# Altium PCB EMG_MainBoard_Layout.PcbDoc (part 1 of 7)
Units mm, origin at the board's own origin, x right, y up, seen from the top; angles counter-clockwise.
Board outline 59.1 x 36 mm, 6 copper layers (L1 TOP, L2 GND, L3 SIGNAL, L4 GND, L5 POWER SIGNAL, L6 BOTTOM), stack 1.146 mm thick; 231 components, 136 nets, 812 pads, 470 vias.
Unrouted connection lines stored in the file: 570.
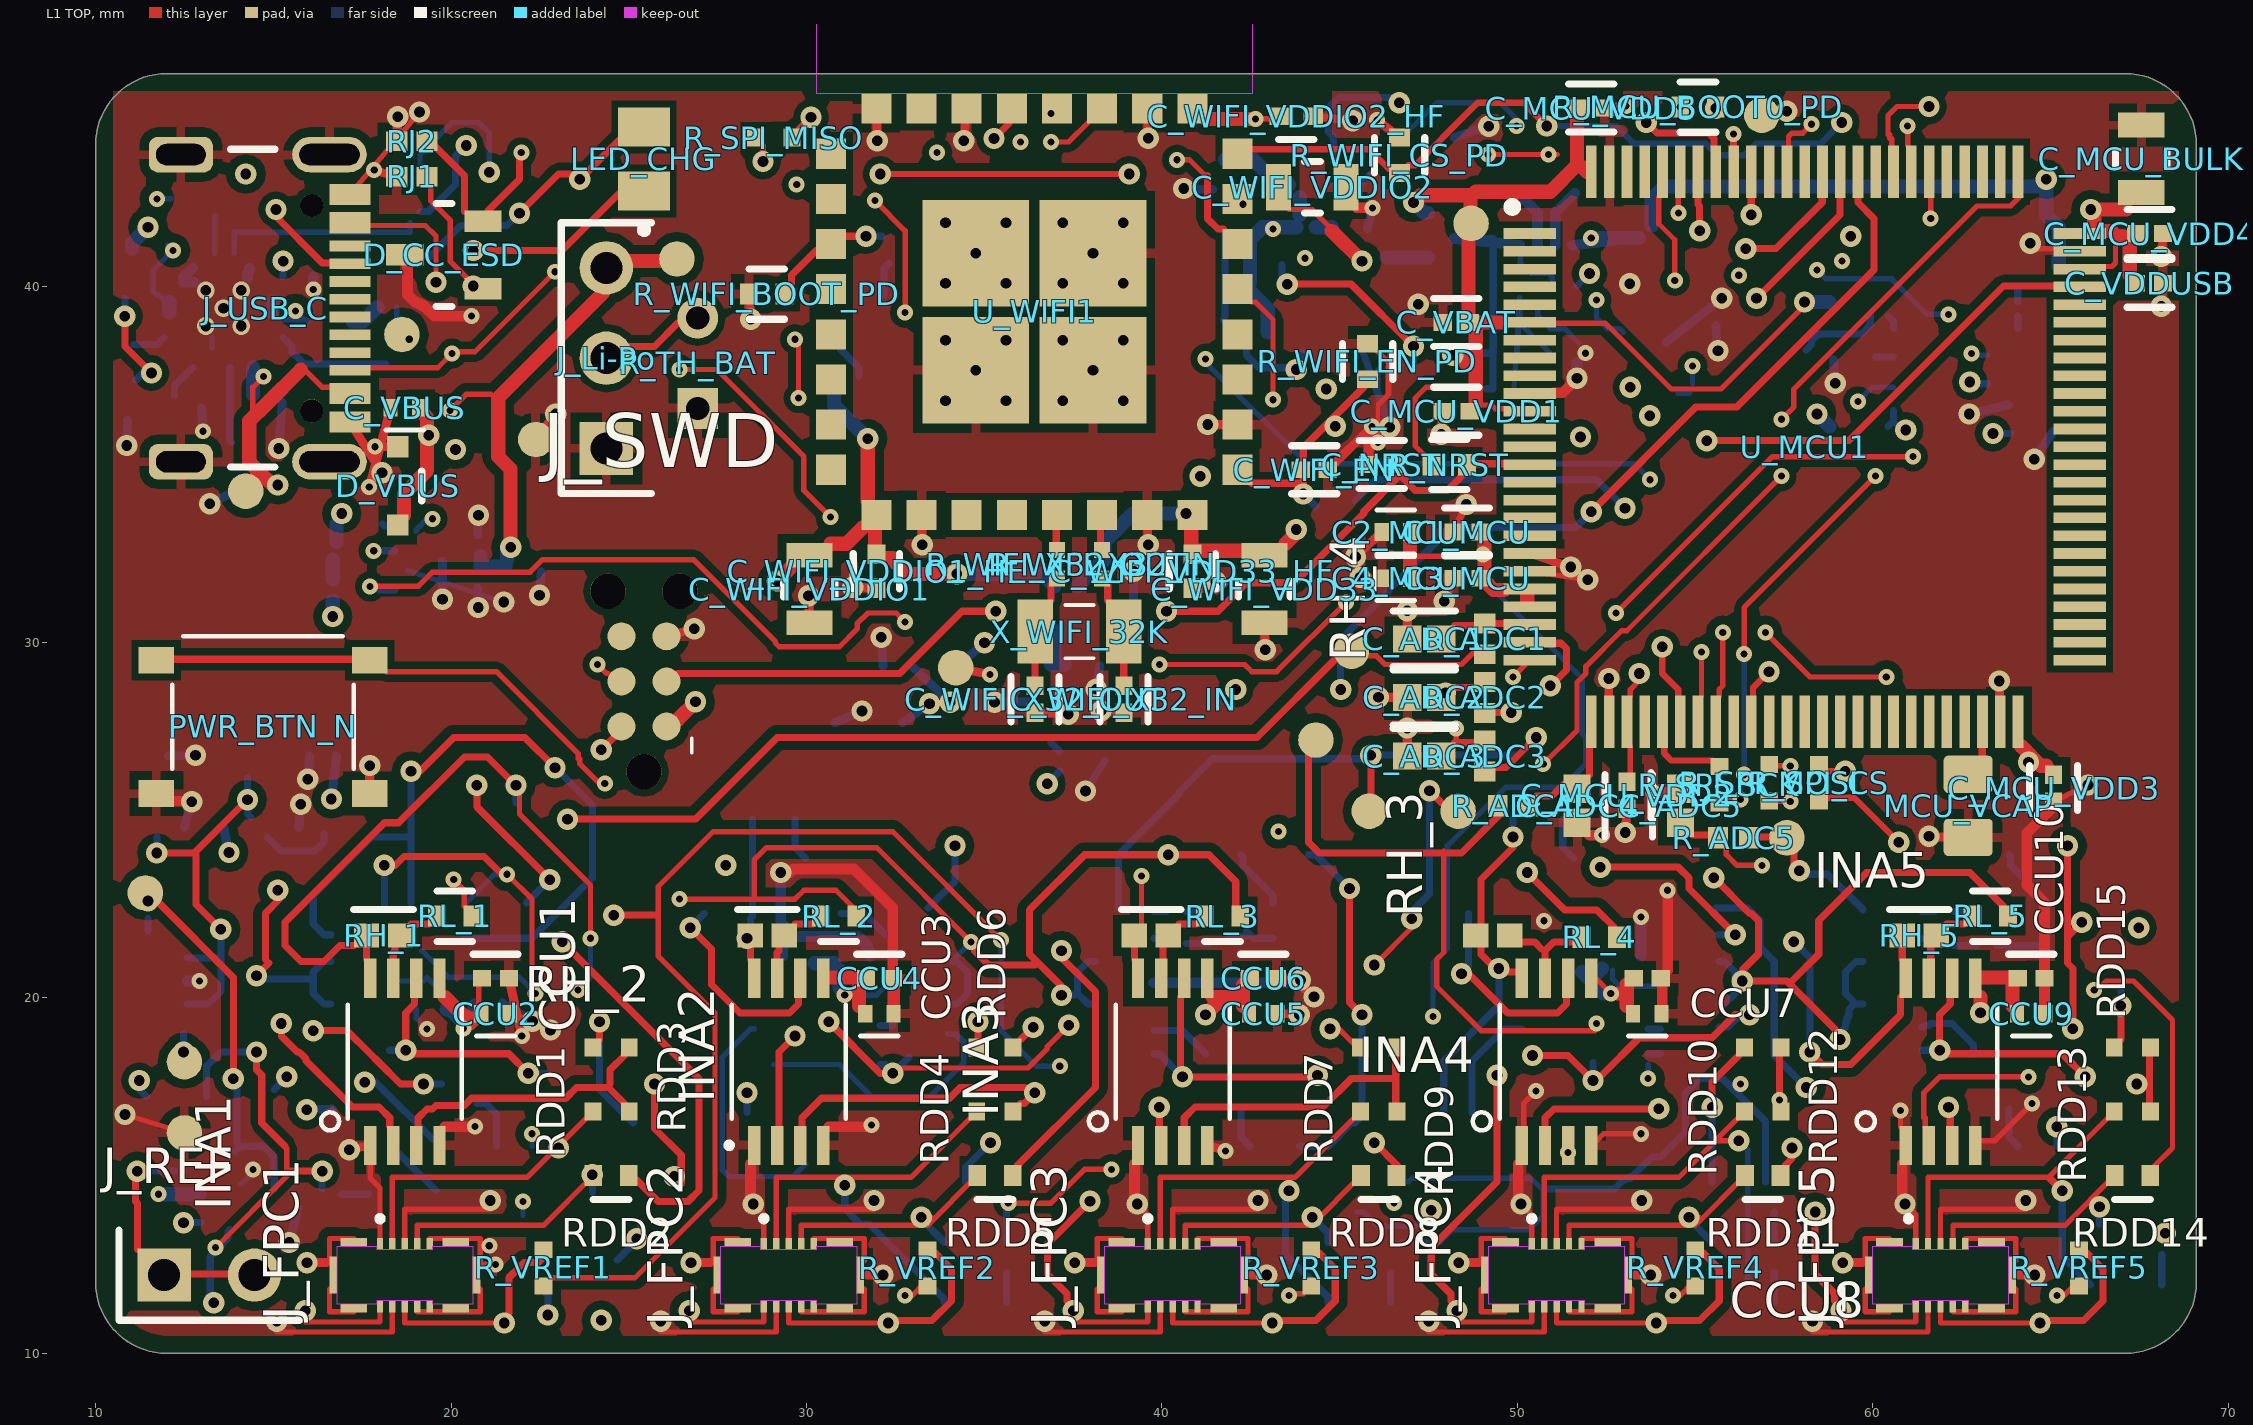
[diagram p0: L1 TOP view]
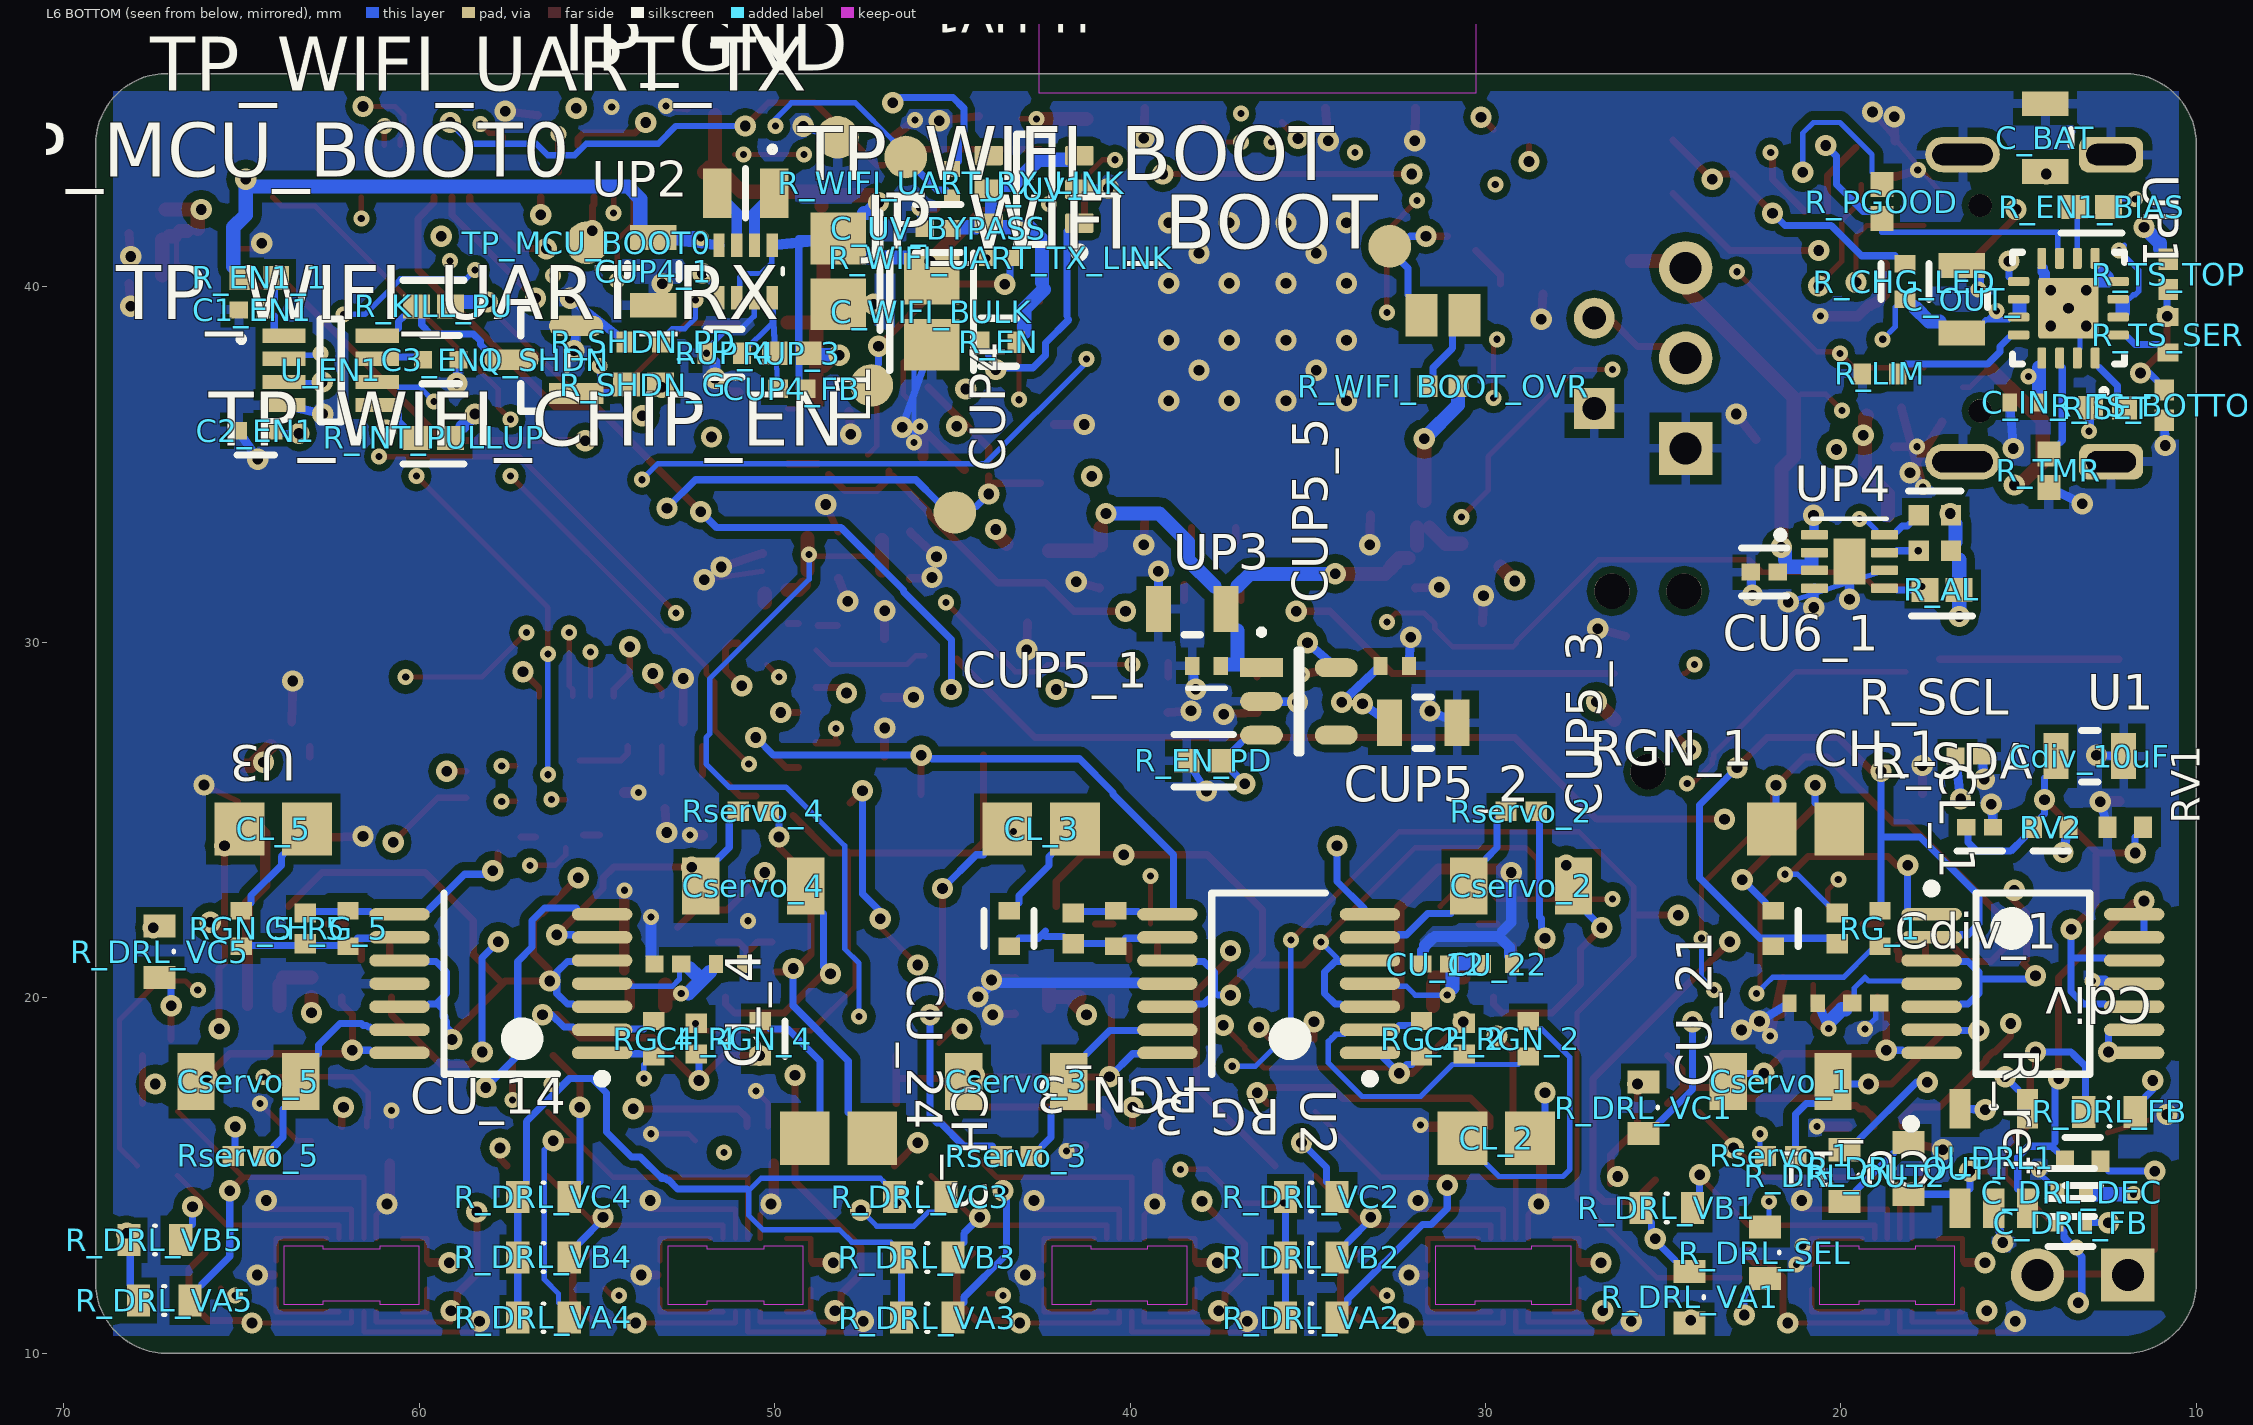
[diagram p1: L6 BOTTOM view, seen from below]
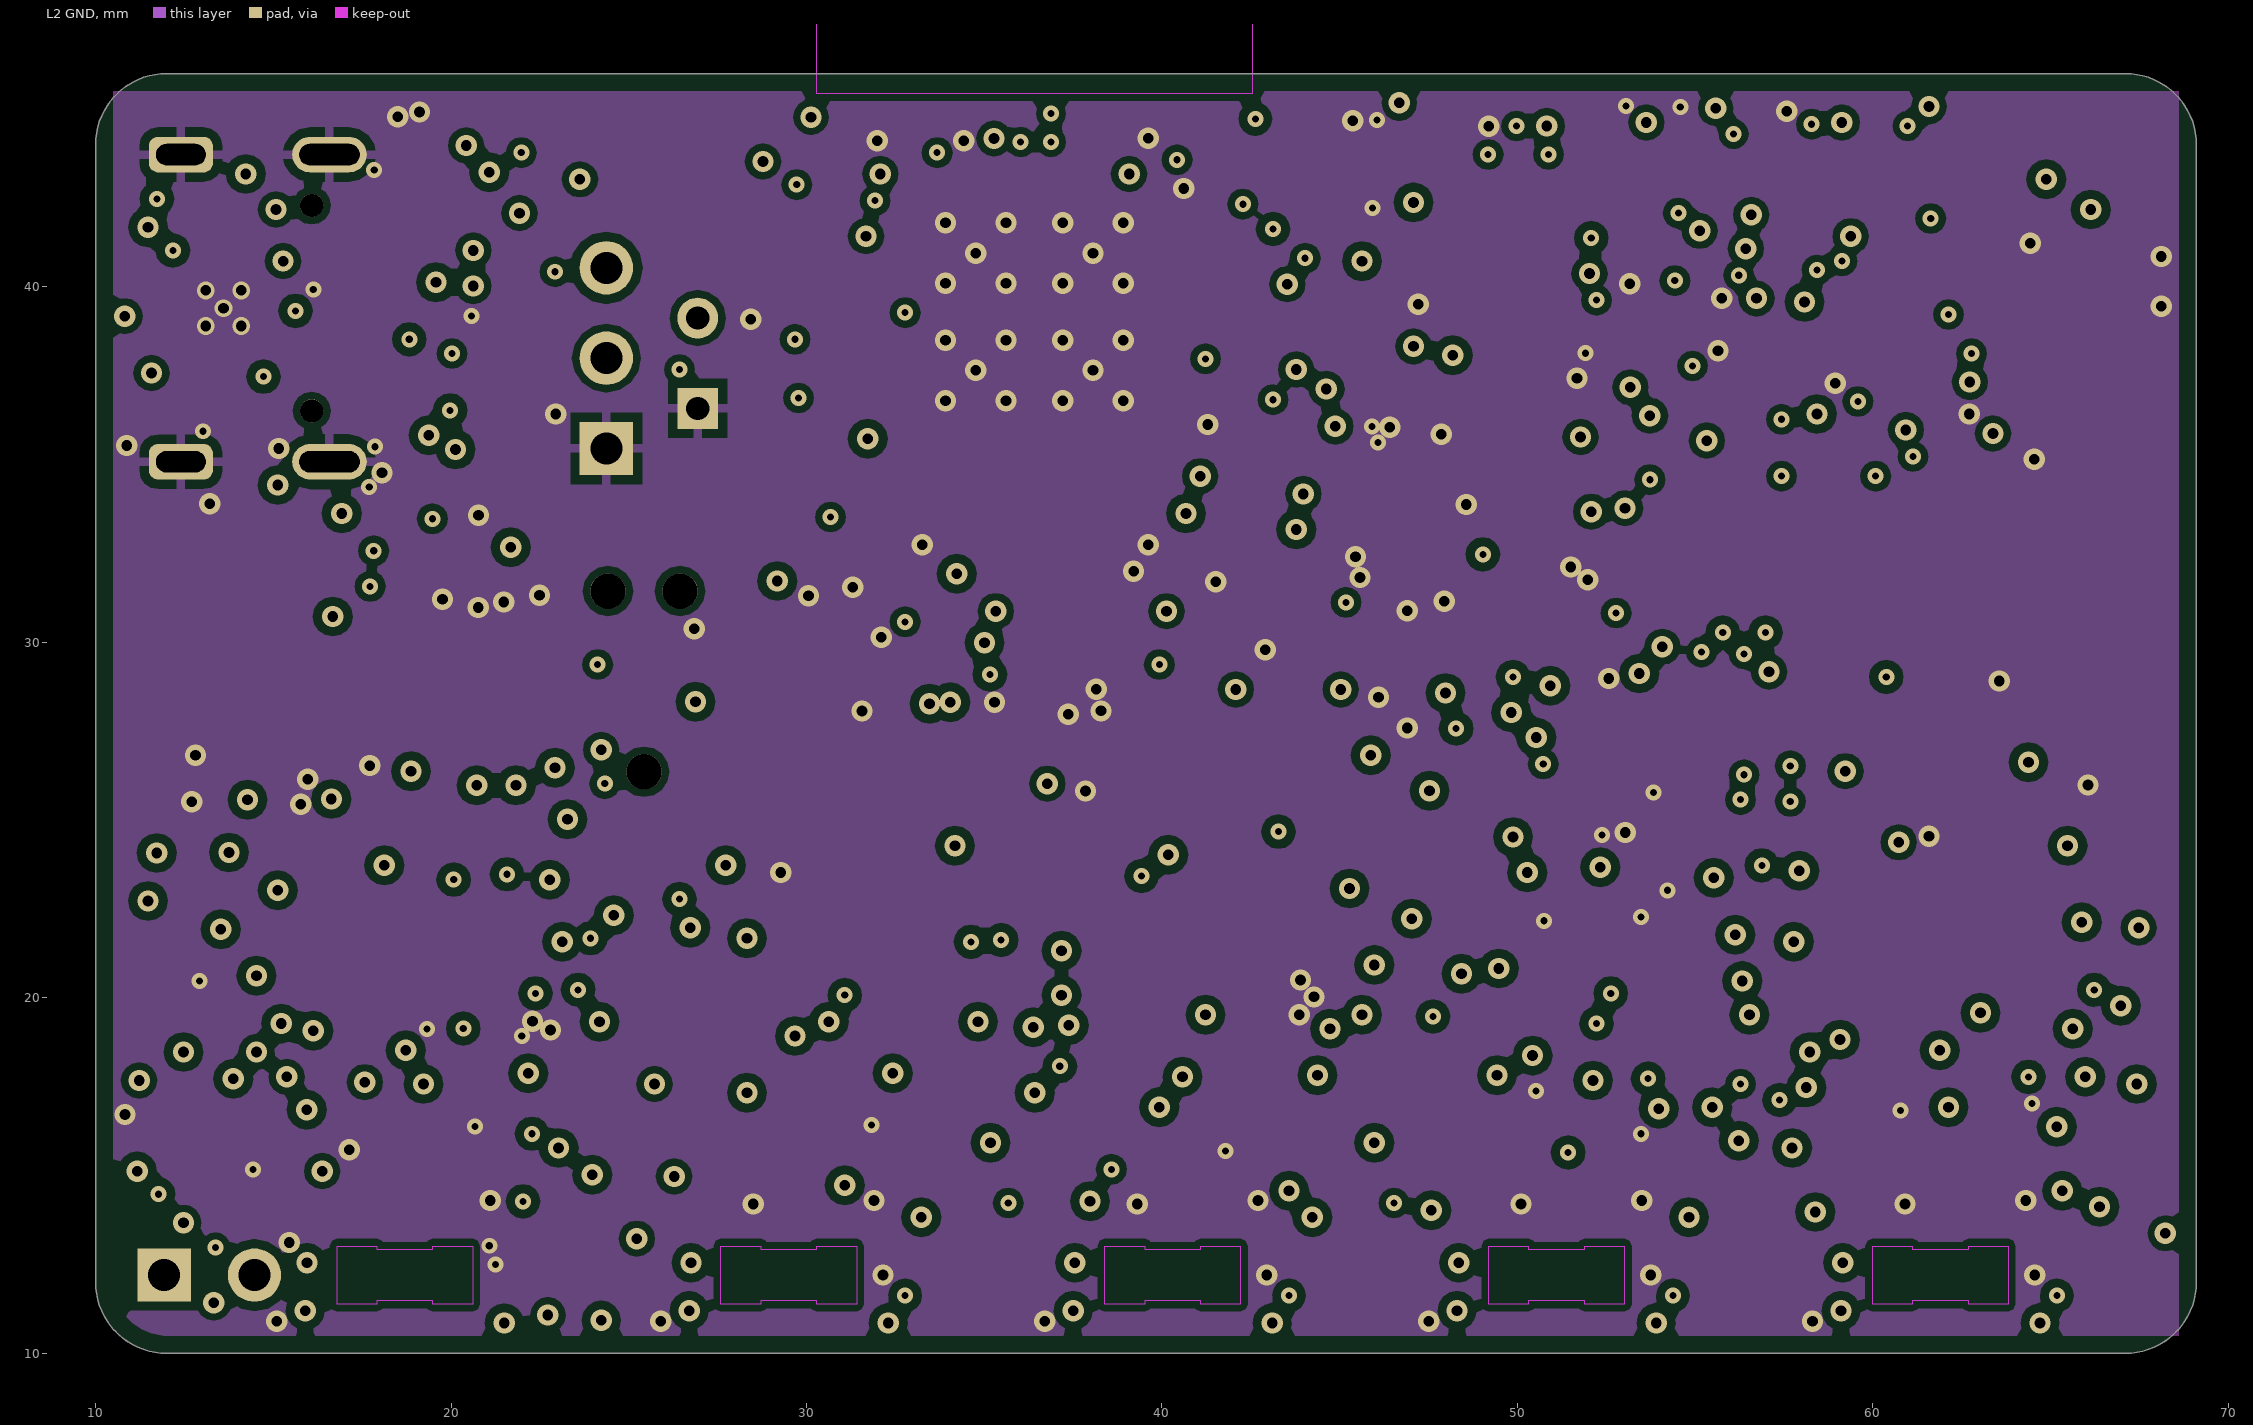
[diagram p2: L2 GND]
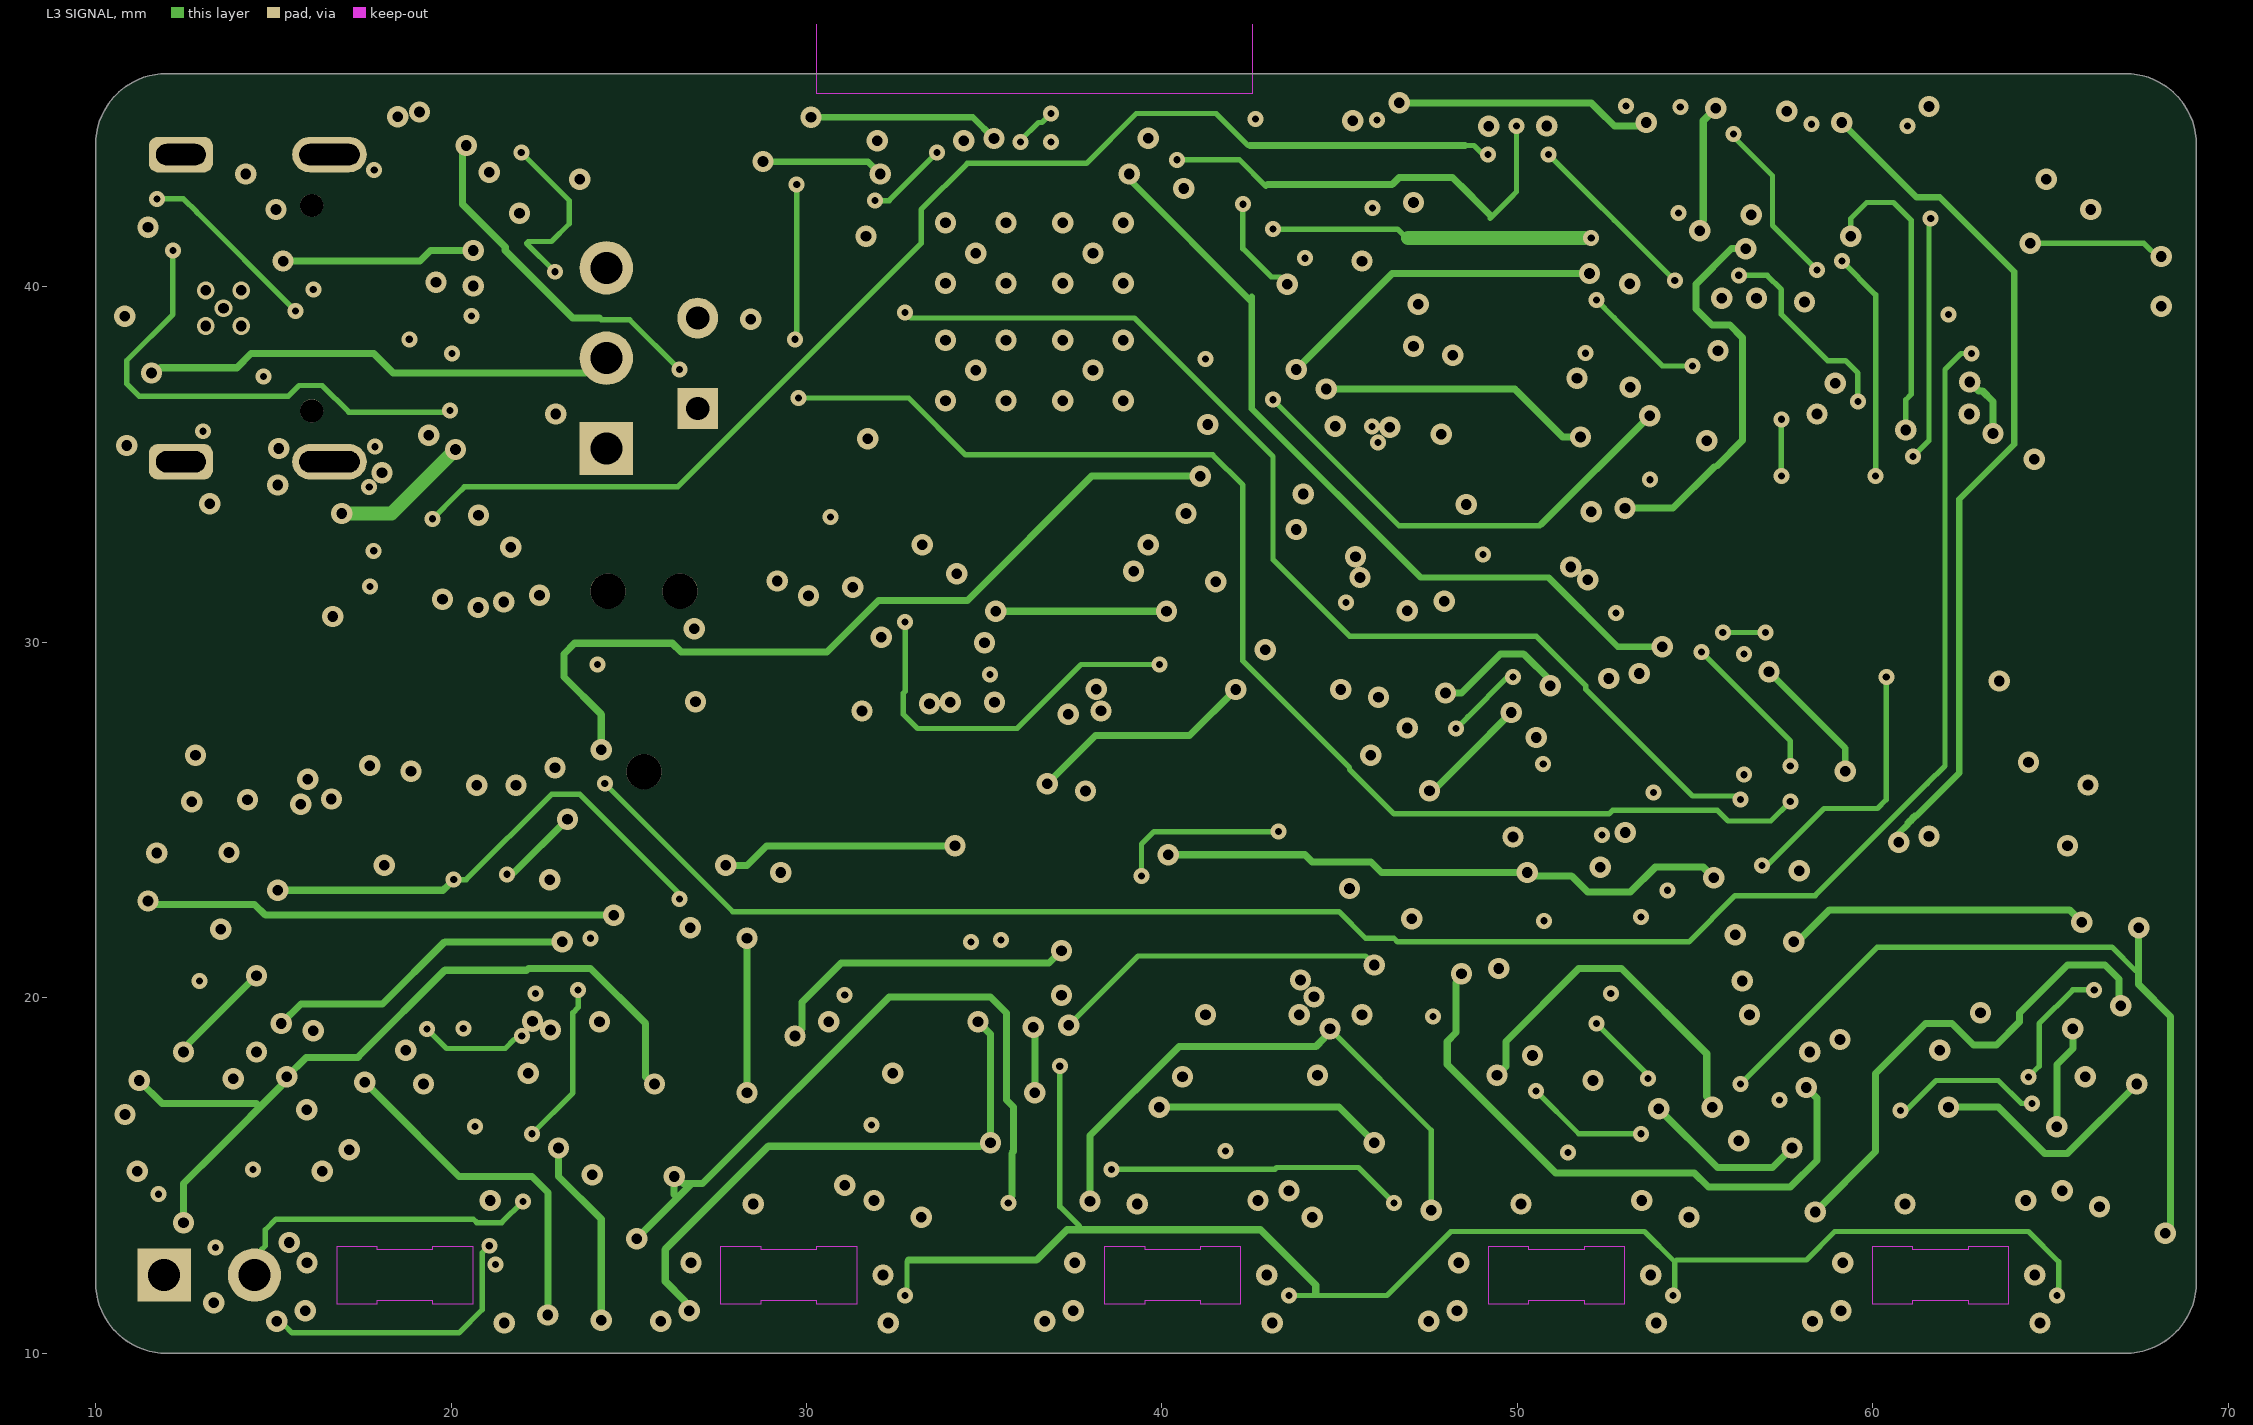
[diagram p3: L3 SIGNAL]
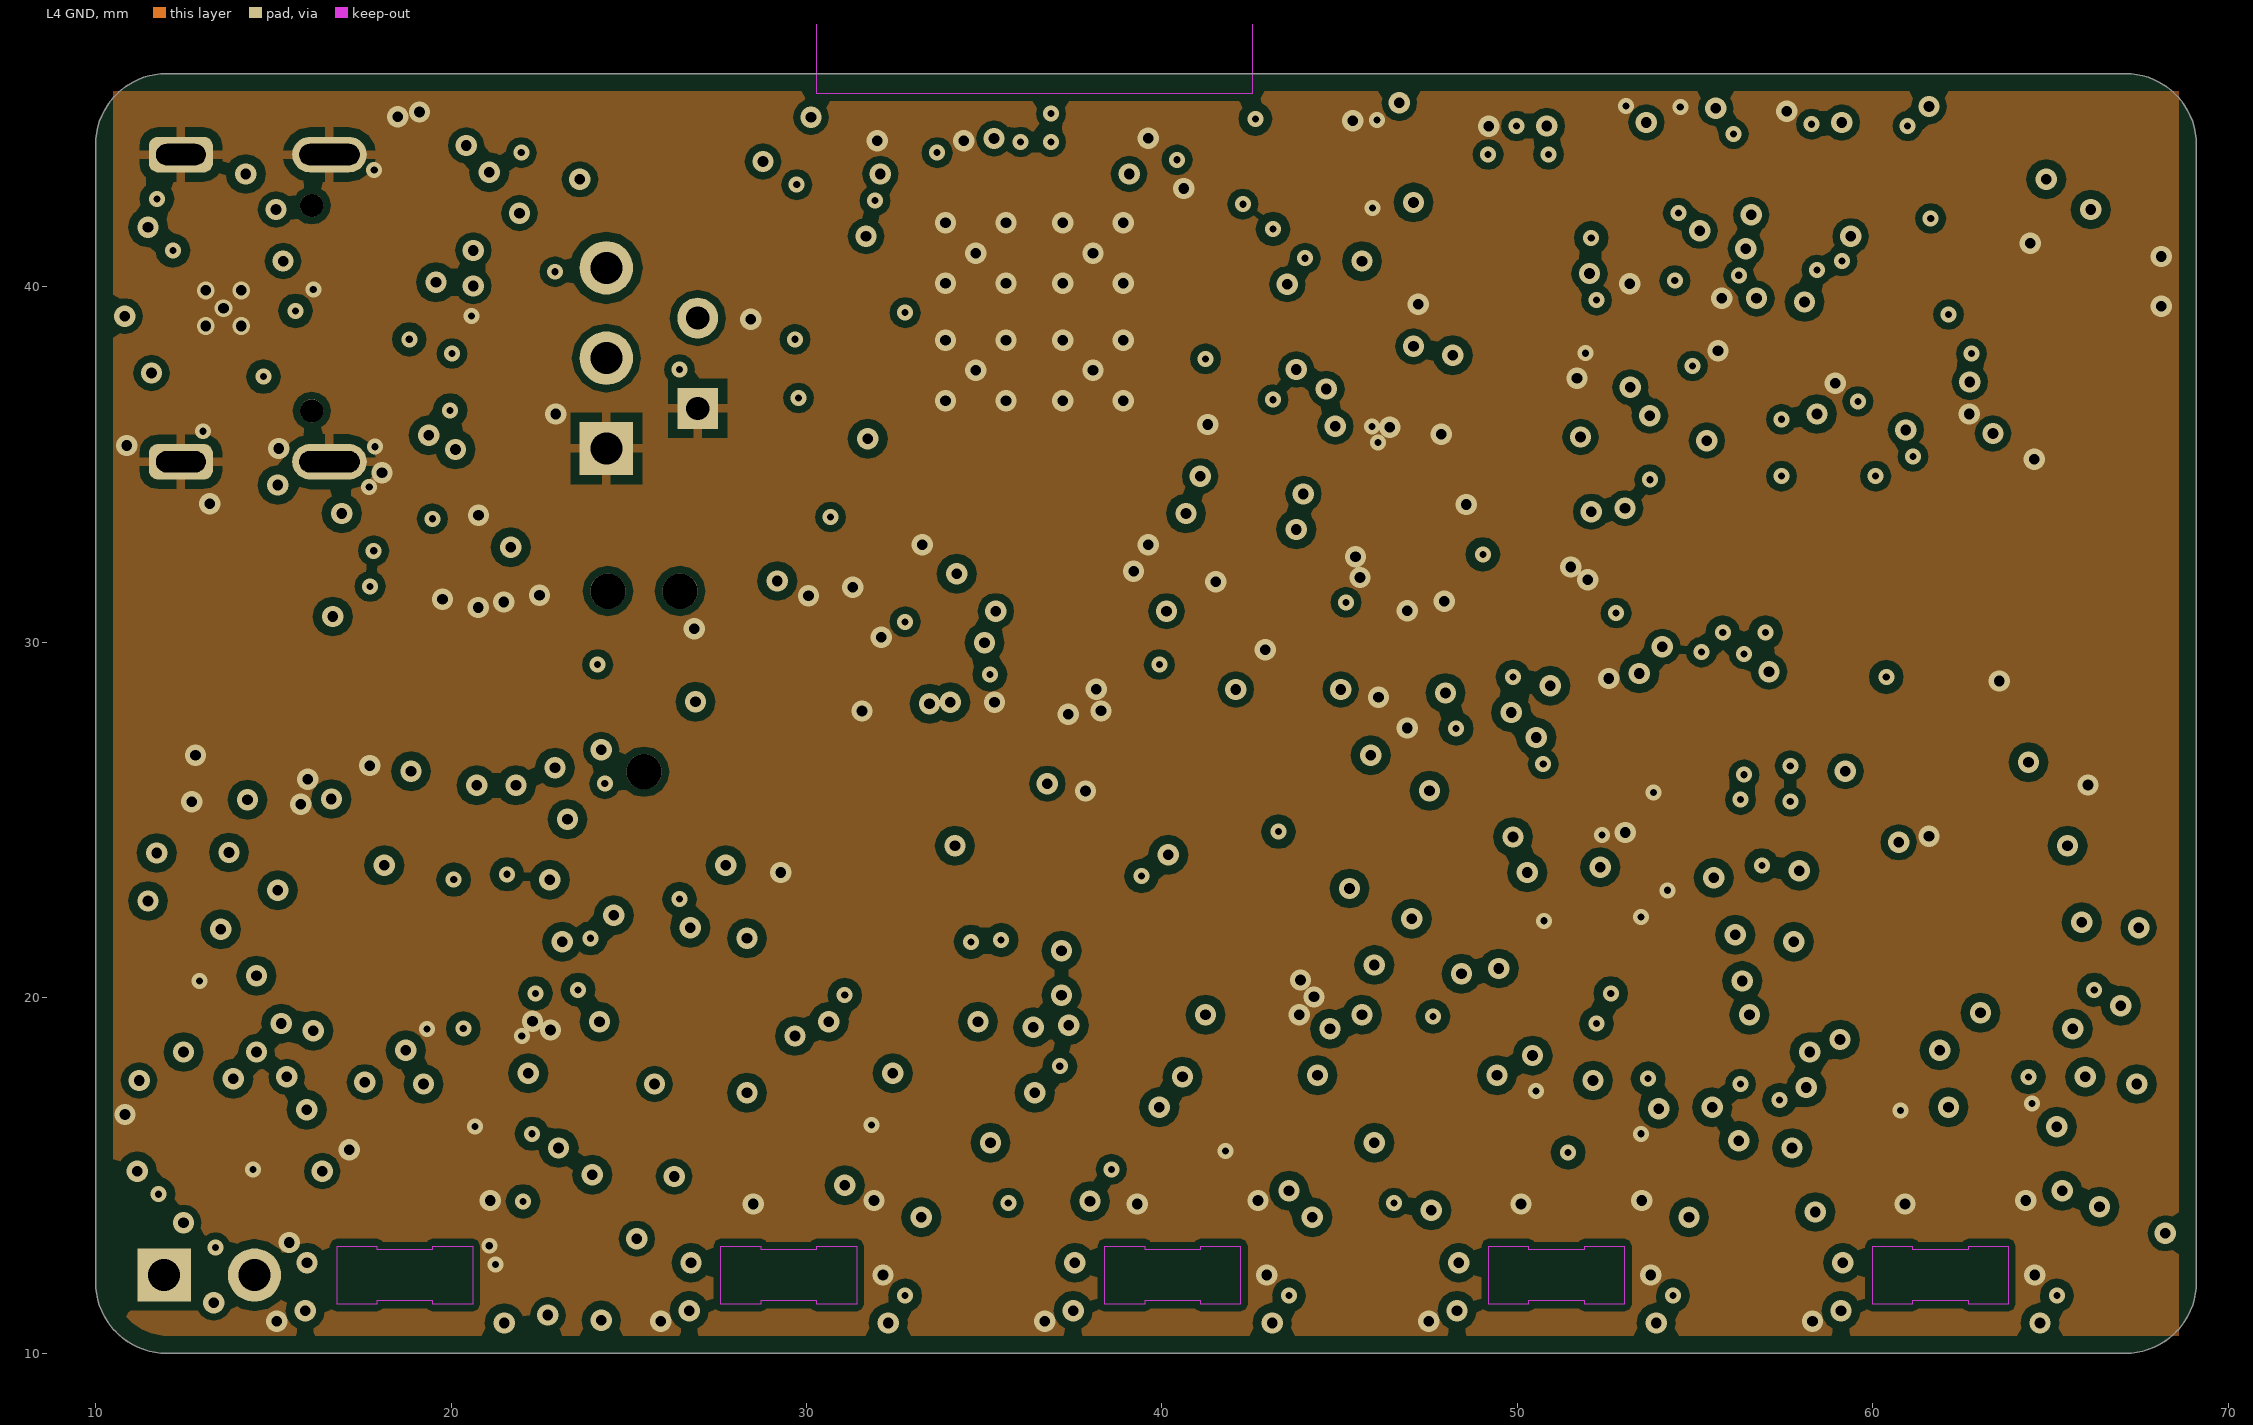
[diagram p4: L4 GND]
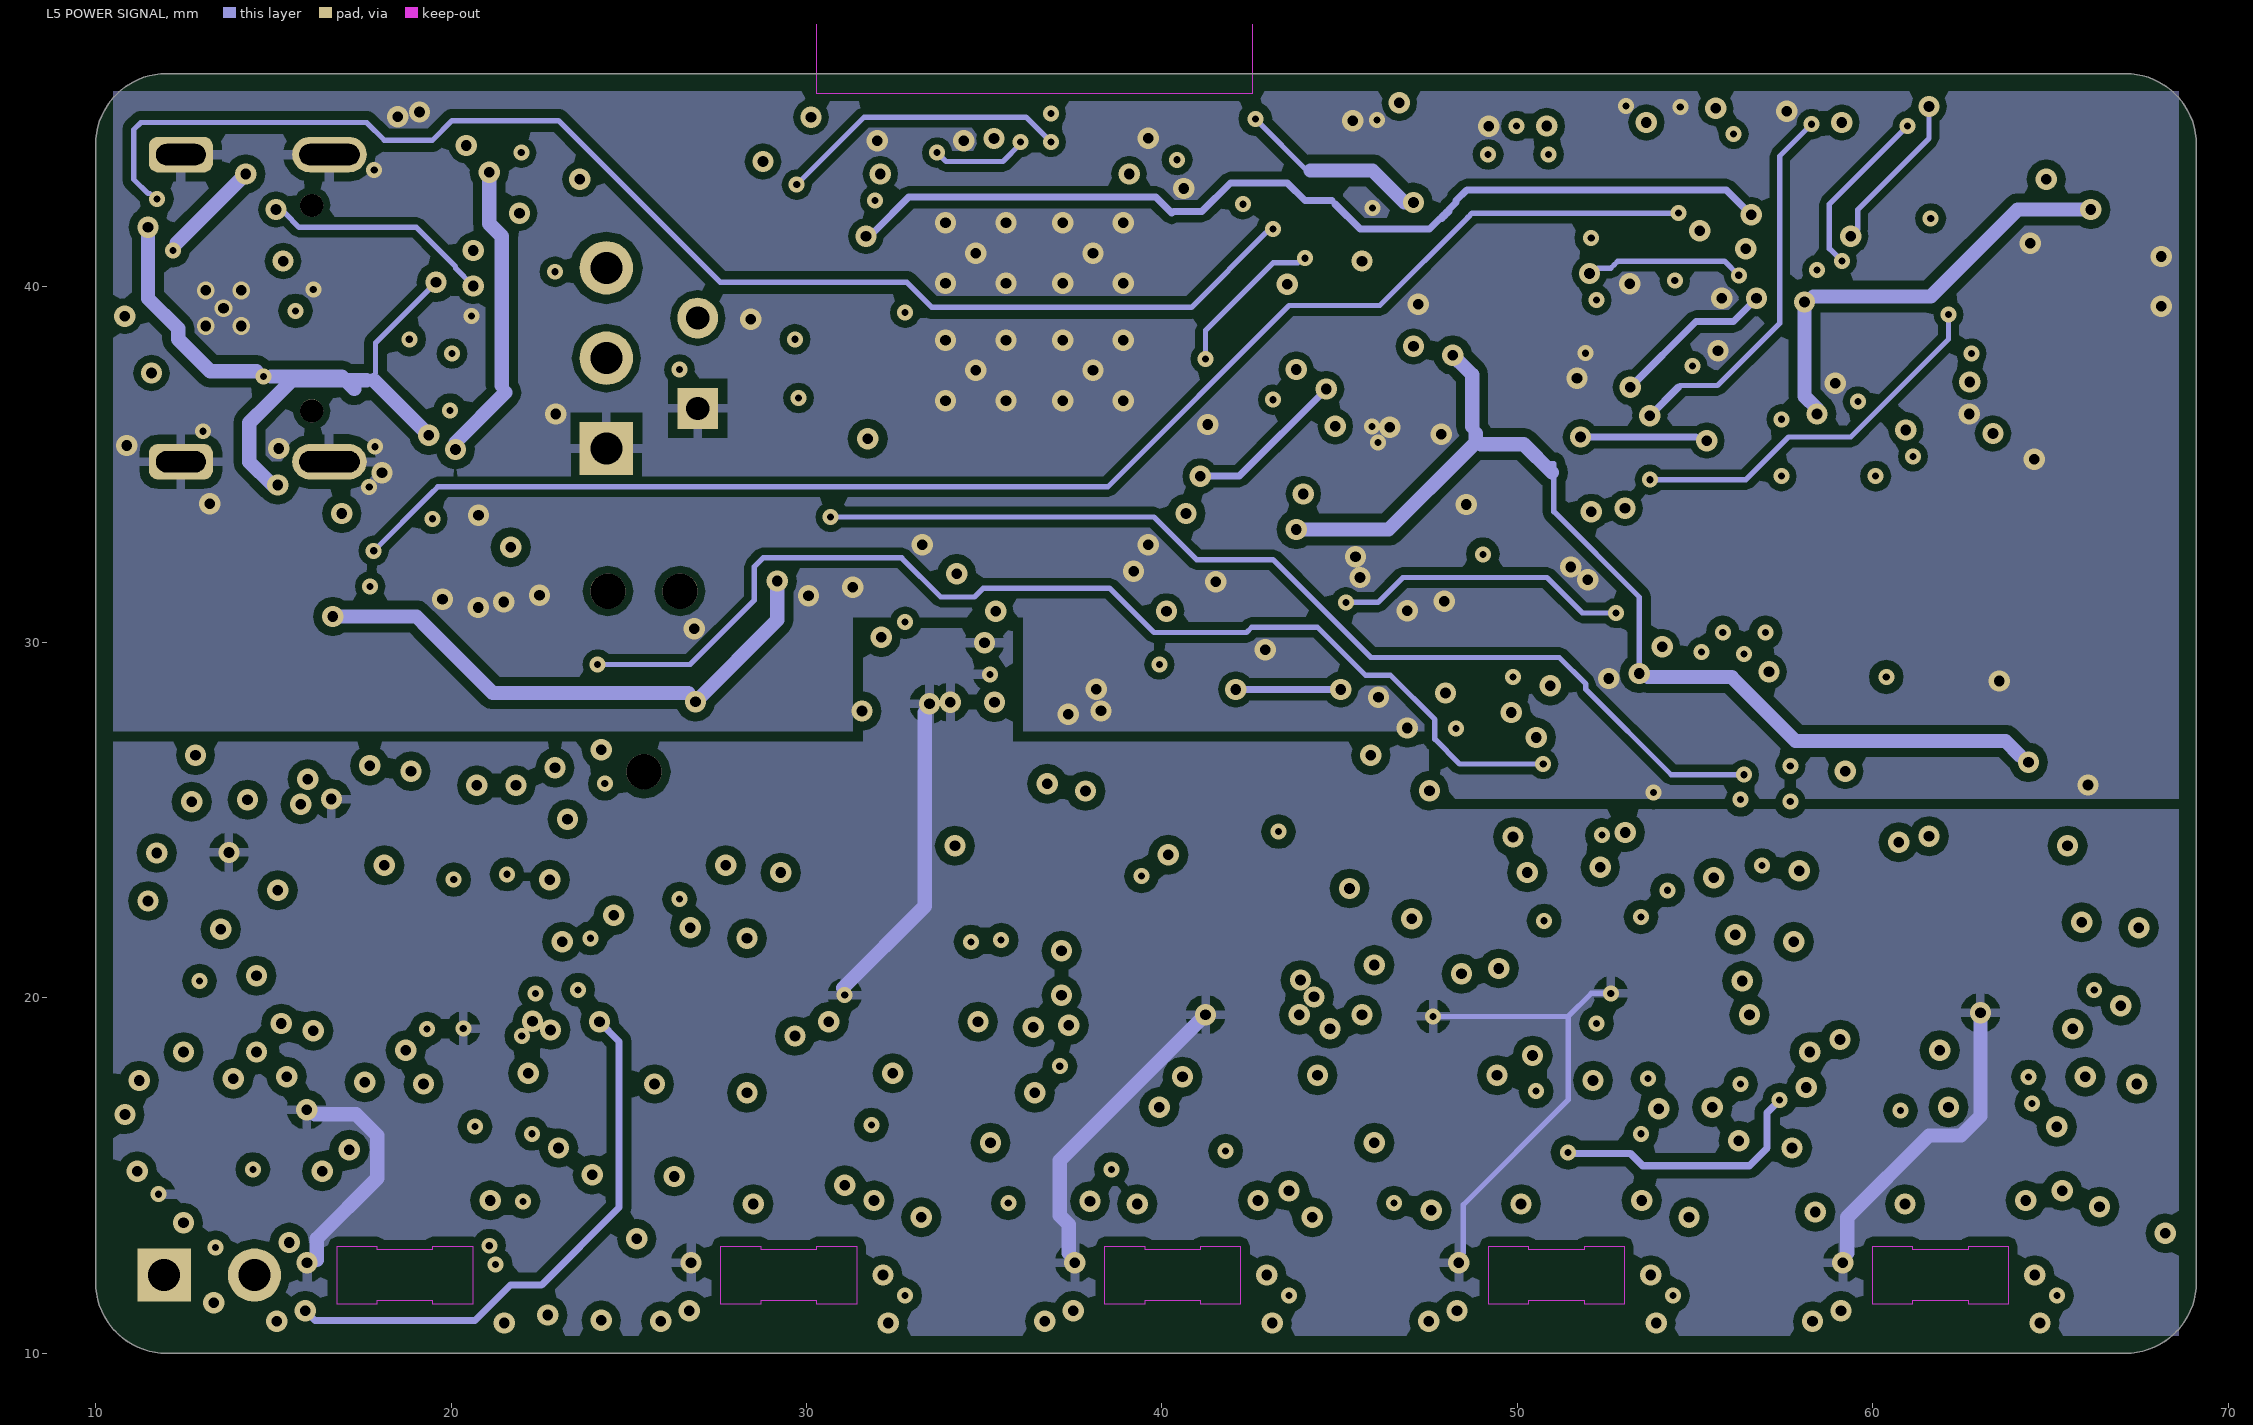
[diagram p5: L5 POWER SIGNAL]
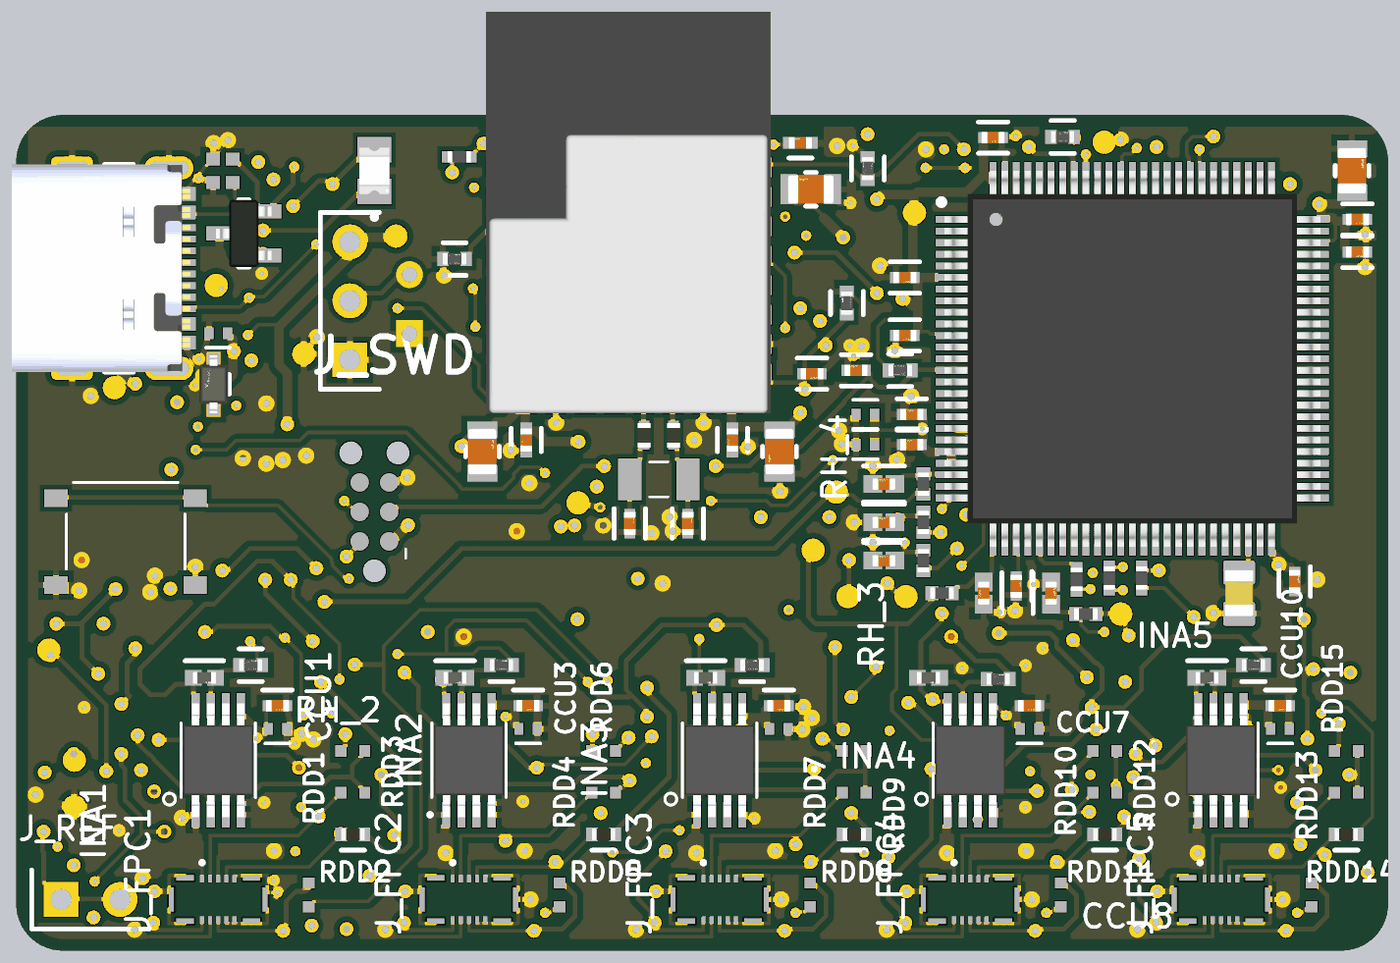
[diagram p9: 3D render of the assembled board from above, using the file's embedded part models]
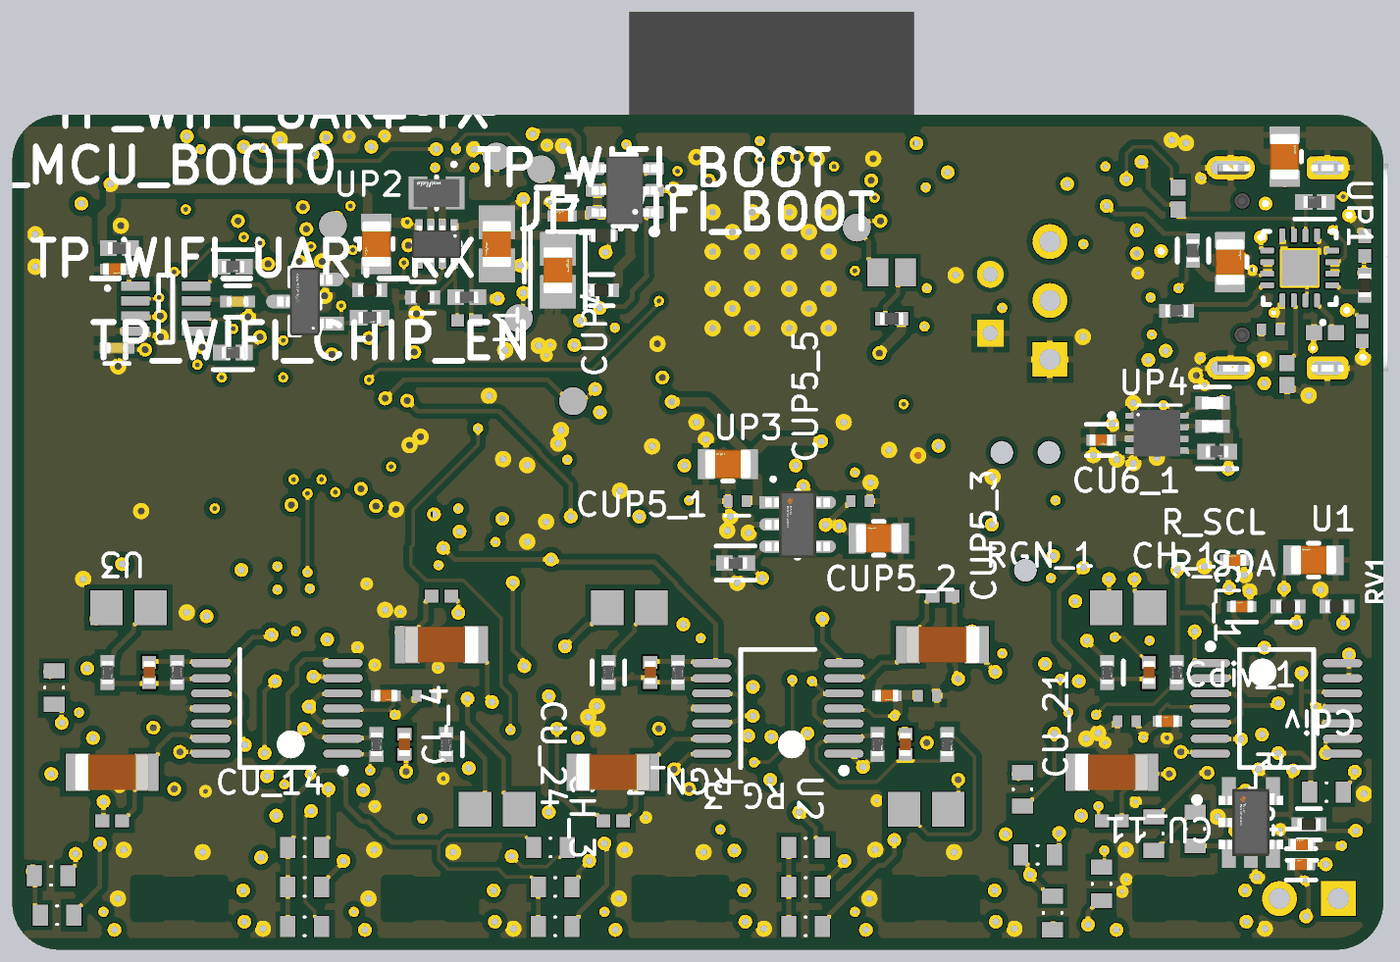
[diagram p10: 3D render of the assembled board from below, using the file's embedded part models]

## Layer stack, top to bottom
Top Solder: solder mask 0.0102, Solder Resist, Dk 3.5
L1 TOP: signal copper 0.035
Dielectric 1: prepreg 0.0994, JLC 3313 prepreg, Dk 4.1
L2 GND: signal copper 0.0152
Dielectric2: core 0.35, JLC core, Dk 4.36
L3 SIGNAL: signal copper 0.0152
Dielectric3: prepreg 0.1164, JLC 2116 prepreg, Dk 4.16
L4 GND: signal copper 0.0152
Dielectric4: core 0.35, JLC core, Dk 4.36
L5 POWER SIGNAL: signal copper 0.0152
Dielectric5: prepreg 0.0994, JLC 3313 prepreg, Dk 4.1
L6 BOTTOM: signal copper 0.035
Bottom Solder: solder mask 0.0102, Solder Resist, Dk 3.5

## Board outline
12,10 67.1,10 ccw(c67.1,12) 69.1,12 69.1,44 ccw(c67.1,44) 67.1,46 12,46 ccw(c12,44) 10,44 10,12 ccw(c12,12)

## Design rules (kind name [scope] priority, off if disabled: settings)
BoardOutlineClearance EDGE_050_GENERAL_PROVISIONAL [All] p1: gap=0.254 ignorepadtopadclearanceinfootprint=FALSE except(0: Arc-SplitContinuation Track-SplitContinuation SMDPad-SplitContinuation THPad-SplitContinuation Via-SplitContinuation Fill-SplitContinuation Poly-SplitContinuation Region-SplitContinuation Text-SplitContinuation; 0.5: Arc-OutlineEdge Track-OutlineEdge SMDPad-OutlineEdge THPad-OutlineEdge Via-OutlineEdge Fill-OutlineEdge Poly-OutlineEdge Region-OutlineEdge Text-OutlineEdge)
Clearance CLR_BK13_ESCAPE_J_FPC5 [InRegionAbsolute(2279.5276,409.4488,2559.0551,594.4882) And (InComponent('J_FPC5') Or InNet('3V0_ANA') Or InNet('GND') Or InNet('NetJ_FPC5_8') Or InNet('Va_5') Or InNet('Vb_5') Or InNet('Vc_5')) vs InRegionAbsolute(2279.5276,409.4488,2559.0551,594.4882) And (InComponent('J_FPC5') Or InNet('3V0_ANA') Or InNet('GND') Or InNet('NetJ_FPC5_8') Or InNet('Va_5') Or InNet('Vb_5') Or InNet('Vc_5'))] p1: gap=0.13 ignorepadtopadclearanceinfootprint=FALSE
Clearance CLR_BK13_ESCAPE_J_FPC4 [InRegionAbsolute(1854.3307,409.4488,2133.8583,594.4882) And (InComponent('J_FPC4') Or InNet('3V0_ANA') Or InNet('GND') Or InNet('NetJ_FPC4_8') Or InNet('Va_4') Or InNet('Vb_4') Or InNet('Vc_4')) vs InRegionAbsolute(1854.3307,409.4488,2133.8583,594.4882) And (InComponent('J_FPC4') Or InNet('3V0_ANA') Or InNet('GND') Or InNet('NetJ_FPC4_8') Or InNet('Va_4') Or InNet('Vb_4') Or InNet('Vc_4'))] p2: gap=0.13 ignorepadtopadclearanceinfootprint=FALSE
Clearance CLR_BK13_ESCAPE_J_FPC3 [InRegionAbsolute(1429.1339,409.4488,1708.6614,594.4882) And (InComponent('J_FPC3') Or InNet('3V0_ANA') Or InNet('GND') Or InNet('NetJ_FPC3_8') Or InNet('Va_3') Or InNet('Vb_3') Or InNet('Vc_3')) vs InRegionAbsolute(1429.1339,409.4488,1708.6614,594.4882) And (InComponent('J_FPC3') Or InNet('3V0_ANA') Or InNet('GND') Or InNet('NetJ_FPC3_8') Or InNet('Va_3') Or InNet('Vb_3') Or InNet('Vc_3'))] p3: gap=0.13 ignorepadtopadclearanceinfootprint=FALSE
Clearance CLR_BK13_ESCAPE_J_FPC2 [InRegionAbsolute(1003.9370,409.4488,1283.4646,594.4882) And (InComponent('J_FPC2') Or InNet('3V0_ANA') Or InNet('GND') Or InNet('NetJ_FPC2_8') Or InNet('Va_2') Or InNet('Vb_2') Or InNet('Vc_2')) vs InRegionAbsolute(1003.9370,409.4488,1283.4646,594.4882) And (InComponent('J_FPC2') Or InNet('3V0_ANA') Or InNet('GND') Or InNet('NetJ_FPC2_8') Or InNet('Va_2') Or InNet('Vb_2') Or InNet('Vc_2'))] p4: gap=0.13 ignorepadtopadclearanceinfootprint=FALSE
Clearance CLR_BK13_ESCAPE_J_FPC1 [InRegionAbsolute(578.7402,409.4488,858.2677,594.4882) And (InComponent('J_FPC1') Or InNet('3V0_ANA') Or InNet('GND') Or InNet('NetJ_FPC1_8') Or InNet('Va_1') Or InNet('Vb_1') Or InNet('Vc_1')) vs InRegionAbsolute(578.7402,409.4488,858.2677,594.4882) And (InComponent('J_FPC1') Or InNet('3V0_ANA') Or InNet('GND') Or InNet('NetJ_FPC1_8') Or InNet('Va_1') Or InNet('Vb_1') Or InNet('Vc_1'))] p5: gap=0.13 ignorepadtopadclearanceinfootprint=FALSE
Clearance CLR_FINE_ESCAPE_B_U_MCU1 [IsPad And InComponent('U_MCU1') vs IsTrack And InRegionAbsolute(1913.5630,1024.5866,2659.6654,1770.6890)] p6: gap=0.15 ignorepadtopadclearanceinfootprint=FALSE
Clearance CLR_FINE_ESCAPE_B_U_DRL1 [IsPad And InComponent('U_DRL1') vs IsTrack And InRegionAbsolute(529.5276,493.3071,706.6929,725.5906)] p7: gap=0.15 ignorepadtopadclearanceinfootprint=FALSE
Clearance CLR_FINE_ESCAPE_B_UP4 [IsPad And InComponent('UP4') vs IsTrack And InRegionAbsolute(684.8386,1196.4567,871.0591,1344.8819)] p8: gap=0.15 ignorepadtopadclearanceinfootprint=FALSE
Clearance CLR_FINE_ESCAPE_B_UP2 [IsPad And InComponent('UP2') vs IsTrack And InRegionAbsolute(1925.2717,1510.5709,2075.6654,1673.1693)] p9: gap=0.15 ignorepadtopadclearanceinfootprint=FALSE
Clearance CLR_FINE_ESCAPE_B_UP1 [IsPad And InComponent('UP1') vs IsTrack And InRegionAbsolute(429.1339,1444.8819,641.7323,1657.4803)] p10: gap=0.15 ignorepadtopadclearanceinfootprint=FALSE
Clearance CLR_FINE_ESCAPE_B_C_DRL_DEC [IsPad And InComponent('C_DRL_DEC') vs IsTrack And InRegionAbsolute(468.7323,522.7559,594.7165,621.1811)] p11: gap=0.15 ignorepadtopadclearanceinfootprint=FALSE
Clearance CLR_ST67_ANTENNA_BOUNDARY_NO_EXTRA_GAP [IsPad And InComponent('U_WIFI1') And ((Name = 'U_WIFI1-25') Or (Name = 'U_WIFI1-26') Or (Name = 'U_WIFI1-27') Or (Name = 'U_WIFI1-28') Or (Name = 'U_WIFI1-29') Or (Name = 'U_WIFI1-30') Or (Name = 'U_WIFI1-31') Or (Name = 'U_WIFI1-32')) vs IsRegion And OnLayer('Keep-Out Layer') And InRegionAbsolute(1191.692913,1788.937008,1675.236220,1985.866142)] p12: gap=0 ignorepadtopadclearanceinfootprint=FALSE
Clearance CLR_FINAL_TT_073 [IsTrack And InNet('NetL1_2') And InRegionAbsolute(1890.232742,1612.932731,1998.500474,1664.704363) vs IsTrack And InNet('3V3_DIG') And InRegionAbsolute(1890.232742,1612.932731,1998.500474,1664.704363)] p13: gap=0.175 ignorepadtopadclearanceinfootprint=FALSE
Clearance CLR_FINAL_TT_072 [IsTrack And InNet('VSYS') And InRegionAbsolute(2002.437442,1612.932731,2110.705174,1664.704363) vs IsTrack And InNet('NetL1_1') And InRegionAbsolute(2002.437442,1612.932731,2110.705174,1664.704363)] p14: gap=0.175 ignorepadtopadclearanceinfootprint=FALSE
Clearance CLR_FINAL_TP_071 [IsTrack And InNet('NetL1_1') And InRegionAbsolute(2002.437442,1612.932731,2018.185474,1664.704363) vs IsPad And (Name = 'UP2-4')] p15: gap=0.15 ignorepadtopadclearanceinfootprint=FALSE
Clearance CLR_FINAL_TP_070 [IsTrack And InNet('VSYS') And InRegionAbsolute(2022.122542,1612.932731,2110.705174,1637.145363) vs IsPad And (Name = 'UP2-3')] p16: gap=0.15 ignorepadtopadclearanceinfootprint=FALSE
Clearance CLR_FINAL_TP_069 [IsTrack And InNet('3V3_DIG') And InRegionAbsolute(1890.232742,1612.932731,1978.815374,1636.191863) vs IsPad And (Name = 'UP2-2')] p17: gap=0.15 ignorepadtopadclearanceinfootprint=FALSE
Clearance CLR_FINAL_TP_068 [IsTrack And InNet('NetL1_2') And InRegionAbsolute(1982.752442,1612.932731,1998.500474,1664.704363) vs IsPad And (Name = 'UP2-1')] p18: gap=0.15 ignorepadtopadclearanceinfootprint=FALSE
Clearance CLR_FINAL_TP_067 [IsTrack And InNet('VSYS') And InRegionAbsolute(582.677044,1543.307129,639.763776,1568.897661) vs IsPad And (Name = 'UP1-9')] p19: gap=0.2 ignorepadtopadclearanceinfootprint=FALSE
Clearance CLR_FINAL_TP_066 [IsTrack And InNet('VBAT_CELL') And InRegionAbsolute(440.944844,1533.464529,488.188876,1549.212561) vs IsPad And (Name = 'UP1-1')] p20: gap=0.2 ignorepadtopadclearanceinfootprint=FALSE
Clearance CLR_FINAL_TP_065 [IsTrack And InNet('3V3_DIG') And InRegionAbsolute(1922.572742,1454.074531,1949.709874,1636.191863) vs IsPad And (Name = 'RUP_3-1')] p21: gap=0.2 ignorepadtopadclearanceinfootprint=FALSE
Clearance CLR_FINAL_PP_064 [IsPad And (Name = 'RUP_3-1') vs IsPad And (Name = 'RUP_3-2')] p22: gap=0.2 ignorepadtopadclearanceinfootprint=FALSE
Clearance CLR_FINAL_PP_063 [IsPad And (Name = 'R_KILL_PU-1') vs IsPad And (Name = 'R_KILL_PU-2')] p23: gap=0.175 ignorepadtopadclearanceinfootprint=FALSE
Clearance CLR_FINAL_PP_062 [IsPad And (Name = 'R_INT_PULLUP-1') vs IsPad And (Name = 'R_INT_PULLUP-2')] p24: gap=0.175 ignorepadtopadclearanceinfootprint=FALSE
Clearance CLR_FINAL_PP_061 [IsPad And (Name = 'R_EN1_BIAS-1') vs IsPad And (Name = 'R_EN1_BIAS-2')] p25: gap=0.175 ignorepadtopadclearanceinfootprint=FALSE
Clearance CLR_FINAL_PP_060 [IsPad And (Name = 'R_EN1_1-1') vs IsPad And (Name = 'R_EN1_1-2')] p26: gap=0.2 ignorepadtopadclearanceinfootprint=FALSE
Clearance CLR_FINAL_PP_059 [IsPad And (Name = 'R_AL-1') vs IsPad And (Name = 'R_AL-2')] p27: gap=0.175 ignorepadtopadclearanceinfootprint=FALSE
Clearance CLR_FINAL_PP_058 [IsPad And (Name = 'R_ADC1-2') vs IsPad And (Name = 'U_MCU1-22')] p28: gap=0.2 ignorepadtopadclearanceinfootprint=FALSE
Clearance CLR_FINAL_PP_057 [IsPad And (Name = 'J_USB_C-B4_A9') vs IsPad And (Name = 'J_USB_C-B5')] p29: gap=0.175 ignorepadtopadclearanceinfootprint=FALSE
Clearance CLR_FINAL_PP_056 [IsPad And (Name = 'J_USB_C-B1_A12') vs IsPad And (Name = 'J_USB_C-B4_A9')] p30: gap=0.175 ignorepadtopadclearanceinfootprint=FALSE
Clearance CLR_FINAL_PP_055 [IsPad And (Name = 'J_USB_C-A4_B9') vs IsPad And (Name = 'J_USB_C-B8')] p31: gap=0.175 ignorepadtopadclearanceinfootprint=FALSE
Clearance CLR_FINAL_PP_054 [IsPad And (Name = 'J_USB_C-A1_B12') vs IsPad And (Name = 'J_USB_C-A4_B9')] p32: gap=0.175 ignorepadtopadclearanceinfootprint=FALSE
Clearance CLR_FINAL_PP_053 [IsPad And InComponent('J_USB_C') And InRegionAbsolute(632.283598,1664.173000,633.858402,1665.747804) vs IsPad And (Name = 'J_USB_C-A4_B9')] p33: gap=0.2 ignorepadtopadclearanceinfootprint=FALSE
Clearance CLR_FINAL_PP_052 [IsPad And InComponent('J_USB_C') And InRegionAbsolute(632.283598,1436.614000,633.858402,1438.188804) vs IsPad And (Name = 'J_USB_C-B4_A9')] p34: gap=0.2 ignorepadtopadclearanceinfootprint=FALSE
Clearance CLR_FINAL_TP_051 [IsTrack And InNet('3V3_DIG') And InRegionAbsolute(1933.736642,1454.074531,1949.709874,1636.191863) vs IsPad And (Name = 'CUP4-2')] p35: gap=0.2 ignorepadtopadclearanceinfootprint=FALSE
Clearance CLR_FINAL_TP_050 [IsTrack And InNet('3V3_DIG') And InRegionAbsolute(1926.059442,1454.074531,1949.484674,1636.191863) vs IsPad And (Name = 'CUP4_FB-1')] p36: gap=0.2 ignorepadtopadclearanceinfootprint=FALSE
Clearance CLR_FINAL_PP_049 [IsPad And (Name = 'CUP4_FB-1') vs IsPad And (Name = 'CUP4_FB-2')] p37: gap=0.2 ignorepadtopadclearanceinfootprint=FALSE
Clearance CLR_FINAL_PP_048 [IsPad And (Name = 'CU6_1-1') vs IsPad And (Name = 'CU6_1-2')] p38: gap=0.2 ignorepadtopadclearanceinfootprint=FALSE
Clearance CLR_FINAL_PP_047 [IsPad And (Name = 'CU_14-1') vs IsPad And (Name = 'CU_14-2')] p39: gap=0.2 ignorepadtopadclearanceinfootprint=FALSE
Clearance CLR_FINAL_PP_046 [IsPad And (Name = 'CU_12-1') vs IsPad And (Name = 'CU_12-2')] p40: gap=0.2 ignorepadtopadclearanceinfootprint=FALSE
Clearance CLR_FINAL_PP_045 [IsPad And (Name = 'CU_11-1') vs IsPad And (Name = 'CU_11-2')] p41: gap=0.2 ignorepadtopadclearanceinfootprint=FALSE
Clearance CLR_FINAL_PP_044 [IsPad And (Name = 'Cdiv-1') vs IsPad And (Name = 'Cdiv-2')] p42: gap=0.2 ignorepadtopadclearanceinfootprint=FALSE
Clearance CLR_FINAL_PP_043 [IsPad And (Name = 'CCU8-1') vs IsPad And (Name = 'CCU8-2')] p43: gap=0.2 ignorepadtopadclearanceinfootprint=FALSE
Clearance CLR_FINAL_PP_042 [IsPad And (Name = 'CCU6-1') vs IsPad And (Name = 'CCU6-2')] p44: gap=0.2 ignorepadtopadclearanceinfootprint=FALSE
Clearance CLR_FINAL_PP_041 [IsPad And (Name = 'CCU4-1') vs IsPad And (Name = 'CCU4-2')] p45: gap=0.2 ignorepadtopadclearanceinfootprint=FALSE
Clearance CLR_FINAL_PP_040 [IsPad And (Name = 'CCU1-1') vs IsPad And (Name = 'CCU1-2')] p46: gap=0.2 ignorepadtopadclearanceinfootprint=FALSE
Clearance CLR_FINAL_PP_039 [IsPad And (Name = 'CCU10-1') vs IsPad And (Name = 'CCU10-2')] p47: gap=0.2 ignorepadtopadclearanceinfootprint=FALSE
Clearance CLR_FINAL_PP_038 [IsPad And (Name = 'C3_MCU-1') vs IsPad And (Name = 'C3_MCU-2')] p48: gap=0.2 ignorepadtopadclearanceinfootprint=FALSE
Clearance CLR_FINAL_PP_037 [IsPad And (Name = 'C1_MCU-1') vs IsPad And (Name = 'C1_MCU-2')] p49: gap=0.2 ignorepadtopadclearanceinfootprint=FALSE
Clearance CLR_FINAL_PP_036 [IsPad And (Name = 'C_VDDUSB-1') vs IsPad And (Name = 'C_VDDUSB-2')] p50: gap=0.2 ignorepadtopadclearanceinfootprint=FALSE
Clearance CLR_FINAL_PP_035 [IsPad And (Name = 'C_VBAT-1') vs IsPad And (Name = 'C_VBAT-2')] p51: gap=0.2 ignorepadtopadclearanceinfootprint=FALSE
Clearance CLR_FINAL_PP_034 [IsPad And (Name = 'C_UV_BYPASS-1') vs IsPad And (Name = 'C_UV_BYPASS-2')] p52: gap=0.2 ignorepadtopadclearanceinfootprint=FALSE
Clearance CLR_FINAL_PP_033 [IsPad And (Name = 'C_MCU_VDD5-1') vs IsPad And (Name = 'C_MCU_VDD5-2')] p53: gap=0.2 ignorepadtopadclearanceinfootprint=FALSE
Clearance CLR_FINAL_PP_032 [IsPad And (Name = 'C_MCU_VDD4-1') vs IsPad And (Name = 'C_MCU_VDD4-2')] p54: gap=0.2 ignorepadtopadclearanceinfootprint=FALSE
Clearance CLR_FINAL_PP_031 [IsPad And (Name = 'C_MCU_VDD3-1') vs IsPad And (Name = 'C_MCU_VDD3-2')] p55: gap=0.2 ignorepadtopadclearanceinfootprint=FALSE
Clearance CLR_FINAL_PP_030 [IsPad And (Name = 'C_MCU_VDD2-1') vs IsPad And (Name = 'C_MCU_VDD2-2')] p56: gap=0.2 ignorepadtopadclearanceinfootprint=FALSE
Clearance CLR_FINAL_PP_029 [IsPad And (Name = 'C_MCU_VDD1-1') vs IsPad And (Name = 'C_MCU_VDD1-2')] p57: gap=0.2 ignorepadtopadclearanceinfootprint=FALSE
Clearance CLR_FINAL_TP_028 [IsTrack And InNet('ADC_EMG5') And InRegionAbsolute(2101.574767,973.346469,2127.165399,1061.023601) vs IsPad And (Name = 'U_MCU1-30')] p58: gap=0.2 ignorepadtopadclearanceinfootprint=FALSE
Clearance CLR_FINAL_TP_027 [IsTrack And InNet('Vservo_1') And InRegionAbsolute(679.133802,662.401564,884.842534,678.149596) vs IsPad And (Name = 'Rservo_1-2')] p59: gap=0.2 ignorepadtopadclearanceinfootprint=FALSE
Clearance CLR_FINAL_TP_026 [IsTrack And InNet('Vservo_1') And InRegionAbsolute(679.133802,662.401564,884.842534,678.149596) vs IsPad And (Name = 'Rservo_1-1')] p60: gap=0.2 ignorepadtopadclearanceinfootprint=FALSE
Clearance CLR_FINAL_PP_025 [IsPad And (Name = 'RH_5-1') vs IsPad And (Name = 'RH_5-2')] p61: gap=0.2 ignorepadtopadclearanceinfootprint=FALSE
Clearance CLR_FINAL_PP_024 [IsPad And (Name = 'RH_4-1') vs IsPad And (Name = 'RH_4-2')] p62: gap=0.2 ignorepadtopadclearanceinfootprint=FALSE
Clearance CLR_FINAL_PP_023 [IsPad And (Name = 'RH_3-1') vs IsPad And (Name = 'RH_3-2')] p63: gap=0.2 ignorepadtopadclearanceinfootprint=FALSE
Clearance CLR_FINAL_PP_022 [IsPad And (Name = 'RH_2-1') vs IsPad And (Name = 'RH_2-2')] p64: gap=0.2 ignorepadtopadclearanceinfootprint=FALSE
Clearance CLR_FINAL_PP_021 [IsPad And (Name = 'RH_1-1') vs IsPad And (Name = 'RH_1-2')] p65: gap=0.2 ignorepadtopadclearanceinfootprint=FALSE
Clearance CLR_FINAL_PP_020 [IsPad And (Name = 'R_ADC2-1') vs IsPad And (Name = 'R_ADC3-2')] p66: gap=0.2 ignorepadtopadclearanceinfootprint=FALSE
Clearance CLR_FINAL_PP_019 [IsPad And (Name = 'R_ADC1-2') vs IsPad And (Name = 'U_MCU1-24')] p67: gap=0.2 ignorepadtopadclearanceinfootprint=FALSE
Clearance CLR_FINAL_PP_018 [IsPad And (Name = 'R_ADC1-1') vs IsPad And (Name = 'U_MCU1-25')] p68: gap=0.2 ignorepadtopadclearanceinfootprint=FALSE
Clearance CLR_FINAL_PP_017 [IsPad And (Name = 'R_ADC1-1') vs IsPad And (Name = 'U_MCU1-24')] p69: gap=0.2 ignorepadtopadclearanceinfootprint=FALSE
Clearance CLR_FINAL_PP_016 [IsPad And (Name = 'R_ADC1-1') vs IsPad And (Name = 'R_ADC2-2')] p70: gap=0.2 ignorepadtopadclearanceinfootprint=FALSE
Clearance CLR_FINAL_TP_015 [IsTrack And InNet('NetINA5_7') And InRegionAbsolute(2416.333832,821.845684,2480.314964,885.826816) vs IsPad And (Name = 'INA5-6')] p71: gap=0.2 ignorepadtopadclearanceinfootprint=FALSE
Clearance CLR_FINAL_TP_014 [IsTrack And InNet('NetINA1_7') And InRegionAbsolute(715.546425,821.845684,779.527557,885.826816) vs IsPad And (Name = 'INA1-6')] p72: gap=0.2 ignorepadtopadclearanceinfootprint=FALSE
Clearance CLR_FINAL_TP_013 [IsTrack And InNet('NetCL_1_1') And InRegionAbsolute(872.047163,875.984200,887.795195,1019.685032) vs IsPad And (Name = 'CL_1-2')] p73: gap=0.2 ignorepadtopadclearanceinfootprint=FALSE
Clearance CLR_FINAL_PP_012 [IsPad And (Name = 'Cdiv_1-1') vs IsPad And (Name = 'Cdiv_1-2')] p74: gap=0.2 ignorepadtopadclearanceinfootprint=FALSE
Clearance CLR_FINAL_PP_011 [IsPad And (Name = 'C_ADC5-1') vs IsPad And (Name = 'C_ADC5-2')] p75: gap=0.125 ignorepadtopadclearanceinfootprint=FALSE
Clearance CLR_FINAL_PP_010 [IsPad And (Name = 'C_ADC4-1') vs IsPad And (Name = 'C_ADC4-2')] p76: gap=0.125 ignorepadtopadclearanceinfootprint=FALSE
Clearance CLR_FINAL_PP_009 [IsPad And (Name = 'C_ADC3-1') vs IsPad And (Name = 'C_ADC3-2')] p77: gap=0.125 ignorepadtopadclearanceinfootprint=FALSE
Clearance CLR_FINAL_PP_008 [IsPad And (Name = 'C_ADC2-1') vs IsPad And (Name = 'C_ADC2-2')] p78: gap=0.125 ignorepadtopadclearanceinfootprint=FALSE
Clearance CLR_FINAL_PP_007 [IsPad And (Name = 'C_ADC1-1') vs IsPad And (Name = 'C_ADC1-2')] p79: gap=0.125 ignorepadtopadclearanceinfootprint=FALSE
Clearance CLR_FINAL_TP_006 [IsTrack And InNet('NetL1_2') And InRegionAbsolute(1982.752442,1612.932731,1998.500474,1664.704363) vs IsPad And (Name = 'UP2-3')] p80: gap=0.15 ignorepadtopadclearanceinfootprint=FALSE
Clearance CLR_FINAL_TP_005 [IsTrack And InNet('NetL1_1') And InRegionAbsolute(2002.437442,1612.932731,2018.185474,1664.704363) vs IsPad And (Name = 'UP2-2')] p81: gap=0.15 ignorepadtopadclearanceinfootprint=FALSE
Clearance CLR_FINAL_VP_004 [IsVia And InNet('GND') And InRegionAbsolute(2148.424882,1043.975984,2149.212284,1044.763386) vs IsPad And (Name = 'U_MCU1-31')] p82: gap=0.175 ignorepadtopadclearanceinfootprint=FALSE
Clearance CLR_FINAL_PP_003 [IsPad And (Name = 'R_SHDN_G-1') vs IsPad And (Name = 'R_SHDN_G-2')] p83: gap=0.175 ignorepadtopadclearanceinfootprint=FALSE
Clearance CLR_FINAL_PP_002 [IsPad And InComponent('J_USB_C') And InRegionAbsolute(632.283598,1664.173000,633.858402,1665.747804) vs IsPad And (Name = 'J_USB_C-A1_B12')] p84: gap=0.175 ignorepadtopadclearanceinfootprint=FALSE
Clearance CLR_FINAL_PP_001 [IsPad And InComponent('J_USB_C') And InRegionAbsolute(632.283598,1436.614000,633.858402,1438.188804) vs IsPad And (Name = 'J_USB_C-B1_A12')] p85: gap=0.175 ignorepadtopadclearanceinfootprint=FALSE
Clearance CLR_PADS_J_FPC5_010 [IsPad And InComponent('J_FPC5') vs IsPad And InComponent('J_FPC5')] p86: gap=0.1 ignorepadtopadclearanceinfootprint=FALSE
Clearance CLR_PADS_J_FPC4_010 [IsPad And InComponent('J_FPC4') vs IsPad And InComponent('J_FPC4')] p87: gap=0.1 ignorepadtopadclearanceinfootprint=FALSE
Clearance CLR_PADS_J_FPC3_010 [IsPad And InComponent('J_FPC3') vs IsPad And InComponent('J_FPC3')] p88: gap=0.1 ignorepadtopadclearanceinfootprint=FALSE
Clearance CLR_PADS_J_FPC2_010 [IsPad And InComponent('J_FPC2') vs IsPad And InComponent('J_FPC2')] p89: gap=0.1 ignorepadtopadclearanceinfootprint=FALSE
Clearance CLR_PADS_J_FPC1_010 [IsPad And InComponent('J_FPC1') vs IsPad And InComponent('J_FPC1')] p90: gap=0.1 ignorepadtopadclearanceinfootprint=FALSE
Clearance CLR_PADS_UP4_010 [IsPad And InComponent('UP4') vs IsPad And InComponent('UP4')] p91: gap=0.1 ignorepadtopadclearanceinfootprint=FALSE
Clearance CLR_PADS_UP2_010 [IsPad And InComponent('UP2') vs IsPad And InComponent('UP2')] p92: gap=0.1 ignorepadtopadclearanceinfootprint=FALSE
Clearance CLR_PADS_UP1_010 [IsPad And InComponent('UP1') vs IsPad And InComponent('UP1')] p93: gap=0.1 ignorepadtopadclearanceinfootprint=FALSE
Clearance CLR_PADS_U_MCU1_010 [IsPad And InComponent('U_MCU1') vs IsPad And InComponent('U_MCU1')] p94: gap=0.1 ignorepadtopadclearanceinfootprint=FALSE
Clearance CLR_POWER_025 [InNetClass('EMG_POWER')] p95: gap=0.25 ignorepadtopadclearanceinfootprint=FALSE
Clearance CLR_ANALOG_025 [InNetClass('EMG_ANALOG') Or InNetClass('EMG_ADC') Or InNetClass('EMG_REFERENCE')] p96: gap=0.25 ignorepadtopadclearanceinfootprint=FALSE
Clearance CLR_GENERAL_020 [All] p97: gap=0.2 ignorepadtopadclearanceinfootprint=FALSE
Clearance [All] p98: gap=0.254 ignorepadtopadclearanceinfootprint=FALSE except(0: Arc-Hole Track-Hole SMDPad-Hole THPad-Hole Via-Hole Fill-Hole Poly-Hole Region-Hole Text-Hole)
ComponentClearance CMP_CLEARANCE_020 [All] p1: gap=0.2 collisioncheckmode=3 verticalgap=0.5 showdistances=FALSE
ComponentClearance [All] p2: gap=0.254 collisioncheckmode=3 verticalgap=0.254 showdistances=FALSE
MinimumSolderMaskSliver [All] p1: minsoldermaskwidth=0.1
PasteMaskExpansion PASTE_NONE_SERVICE_PADS [IsPad And (InComponent('JP_WIFI_BOOT') Or InComponent('J_SWD') Or InComponent('TP_GND') Or InComponent('TP_MCU_BOOT0') Or InComponent('TP_WIFI_BOOT') Or InComponent('TP_WIFI_CHIP_EN') Or InComponent('TP_WIFI_UART_RX') Or InComponent('TP_WIFI_UART_TX'))] p1: expansion=-1
PasteMaskExpansion [All] p2: expansion=0
PolygonConnect POLYGON_GND_VIAS_DIRECT [IsVia And InNet('GND')] p1: connectstyle=Direct reliefconductorwidth=0.254 reliefentries=4 polygonreliefangle="90 Angle" airgapwidth=0.254
PolygonConnect [All] p2: connectstyle=Relief reliefconductorwidth=0.254 reliefentries=4 polygonreliefangle="90 Angle" airgapwidth=0.254
RoutingVias VIA_STD_060_030 [All] p1: holewidth=0.3 width=0.6 viastyle="Through Hole" minholewidth=0.2 minwidth=0.45 maxholewidth=0.3 maxwidth=0.6
RoutingVias [All] p2: holewidth=0.711 width=1.27 viastyle="Through Hole" minholewidth=0.711 minwidth=1.27 maxholewidth=0.711 maxwidth=1.27
SolderMaskExpansion SMX_VIA_TENTED [IsVia] p1: expansion=-0.35 istentingtop=FALSE
SolderMaskExpansion [All] p2: expansion=0.05 istentingtop=FALSE
Width WIDTH_EMG_GND [InNetClass('EMG_GND')] p1: maxlimit=3 minlimit=0.15 preferedwidth=0.4 minimp=50.000000 maximp=50.000000 favimp=50.000000
Width WIDTH_EMG_SWITCH [InNetClass('EMG_SWITCH')] p2: maxlimit=1.5 minlimit=0.2 preferedwidth=0.5 minimp=50.000000 maximp=50.000000 favimp=50.000000
Width WIDTH_EMG_CRYSTAL [InNetClass('EMG_CRYSTAL')] p3: maxlimit=0.3 minlimit=0.15 preferedwidth=0.2 minimp=50.000000 maximp=50.000000 favimp=50.000000
Width WIDTH_EMG_SPI [InNetClass('EMG_SPI')] p4: maxlimit=0.3 minlimit=0.15 preferedwidth=0.18 minimp=50.000000 maximp=50.000000 favimp=50.000000
Width WIDTH_EMG_POWER [InNetClass('EMG_POWER')] p5: maxlimit=3 minlimit=0.15 preferedwidth=0.9 minimp=50.000000 maximp=50.000000 favimp=50.000000
Width WIDTH_EMG_REFERENCE [InNetClass('EMG_REFERENCE')] p6: maxlimit=0.5 minlimit=0.15 preferedwidth=0.3 minimp=50.000000 maximp=50.000000 favimp=50.000000
Width WIDTH_EMG_ADC [InNetClass('EMG_ADC')] p7: maxlimit=0.3 minlimit=0.15 preferedwidth=0.2 minimp=50.000000 maximp=50.000000 favimp=50.000000
Width WIDTH_EMG_ANALOG [InNetClass('EMG_ANALOG')] p8: maxlimit=0.4 minlimit=0.15 preferedwidth=0.2 minimp=50.000000 maximp=50.000000 favimp=50.000000
Width WIDTH_EMG_CONTROL [InNetClass('EMG_CONTROL')] p9: maxlimit=0.5 minlimit=0.15 preferedwidth=0.2 minimp=50.000000 maximp=50.000000 favimp=50.000000
Width [All] p10: maxlimit=0.5 minlimit=0.15 preferedwidth=0.2 minimp=50.000000 maximp=50.000000 favimp=50.000000
27 further rules are at their usual default settings.

## Classes and differential pairs
component class RADIO: C_WIFI_BULK C_WIFI_EN C_WIFI_VDD33 C_WIFI_VDD33_HF C_WIFI_VDDIO1 C_WIFI_VDDIO1_HF C_WIFI_VDDIO2 C_WIFI_VDDIO2_HF C_WIFI_X32_IN C_WIFI_X32_OUT R_WIFI_BOOT_OVR R_WIFI_BOOT_PD R_WIFI_CS_PD R_WIFI_EN_PD R_WIFI_UART_RX_LINK R_WIFI_UART_TX_LINK R_WIFI_X32_IN R_WIFI_X32_OUT U_WIFI1 X_WIFI_32K
component class MCU_ADC_SERVICE: C1_MCU C2_MCU C3_MCU C4_MCU C_ADC1 C_ADC2 C_ADC3 C_ADC4 C_ADC5 C_MCU_BULK C_MCU_VDD1 C_MCU_VDD2 C_MCU_VDD3 C_MCU_VDD4 C_MCU_VDD5 C_NRST C_VBAT C_VDDUSB MCU_VCAP R_ADC1 R_ADC2 R_ADC3 R_ADC4 R_ADC5 R_MCU_BOOT0_PD R_NRST R_SPI_CS R_SPI_MISO R_SPI_MOSI R_SPI_SCK U_MCU1
component class POWER_SERVICE: C1_EN1 C2_EN1 C3_EN1 C_BAT C_IN_ C_OUT_ C_UV_BYPASS C_VBUS CU6_1 CUP4 CUP4_1 CUP4_FB CUP5_1 CUP5_2 CUP5_3 CUP5_5 D_CC_ESD D_VBUS J_Li-Po J_USB_C L1 LED_CHG PWR_BTN_N Q_SHDN R_AL R_CHG_LED R_EN R_EN1_1 R_EN1_BIAS R_EN_PD R_INT_PULLUP R_KILL_PU R_LIM R_PGOOD R_SCL R_SDA R_SHDN_G R_SHDN_PD R_TH_BAT R_TMR R_TS_BOTTOM R_TS_SER R_TS_TOP RISET RJ1 RJ2 RUP_3 RUP_4 U_EN1 U_UV1 UP1 UP2 UP3 UP4
component class QUIET_CH4_CH5: CCU7 CCU8 CCU9 CCU10 CH_4 CH_5 CL_4 CL_5 Cservo_4 Cservo_5 CU_14 CU_24 INA4 INA5 J_FPC4 J_FPC5 RDD10 RDD11 RDD12 RDD13 RDD14 RDD15 RG_4 RG_5 RGN_4 RGN_5 RH_4 RH_5 RL_4 RL_5 Rservo_4 Rservo_5 U3
component class QUIET_CH2_CH3: CCU3 CCU4 CCU5 CCU6 CH_2 CH_3 CL_2 CL_3 Cservo_2 Cservo_3 CU_12 CU_22 INA2 INA3 J_FPC2 J_FPC3 RDD4 RDD5 RDD6 RDD7 RDD8 RDD9 RG_2 RG_3 RGN_2 RGN_3 RH_2 RH_3 RL_2 RL_3 Rservo_2 Rservo_3 U2
component class QUIET_CH1_REFERENCE: CCU1 CCU2 Cdiv Cdiv_1 Cdiv_10uF CH_1 CL_1 Cservo_1 CU_11 CU_21 INA1 J_FPC1 J_REF R_ref R_VREF1 R_VREF2 R_VREF3 R_VREF4 R_VREF5 RDD1 RDD2 RDD3 RG_1 RGN_1 RH_1 RL_1 Rservo_1 RV1 RV2 U1
net class EMG_GND: GND
net class EMG_CONTROL: AFE_EN BAT_TEMP FG_ALRT I2C_SCL I2C_SDA KILL_CTRL MCU_BOOT0 MCU_NRST MCU_PWR_INT_N MCU_SHUTDOWN MCU_SWCLK MCU_SWDIO MCU_VCAP MCU_WIFI_UART_RX MCU_WIFI_UART_TX NetC1_EN1_2 NetC2_EN1_1 NetC3_EN1_2 NetCUP4_FB_1 NetD_CC_ESD_1 NetD_CC_ESD_2 NetJP_WIFI_BOOT_1 NetLED_CHG_A NetLED_CHG_C NetPWR_BTN_N_A NetQ_SHDN_1 NetR_EN1_BIAS_2 NetR_LIM_2 NetR_TMR_2 NetRISET_1 SYS_EN TS USB_PGOOD_N WIFI_BOOT WIFI_CHIP_EN WIFI_SPI_RDY WIFI_UART_RX WIFI_UART_TX
net class EMG_ANALOG: INA_OUT_1 INA_OUT_2 INA_OUT_3 INA_OUT_4 INA_OUT_5 NetCH_1_2 NetCH_2_2 NetCH_3_2 NetCH_4_2 NetCH_5_2 NetCL_1_1 NetCL_2_1 NetCL_3_1 NetCL_4_1 NetCL_5_1 NetCservo_1_1 NetCservo_2_1 NetCservo_3_1 NetCservo_4_1 NetCservo_5_1 NetINA1_2 NetINA1_3 NetINA1_7 NetINA2_2 NetINA2_3 NetINA2_7 NetINA3_2 NetINA3_3 NetINA3_7 NetINA4_2 NetINA4_3 NetINA4_7 NetINA5_2 NetINA5_3 NetINA5_7 NetJ_REF_1 Va_1 Va_2 Va_3 Va_4 Va_5 Vb_1 Vb_2 Vb_3 Vb_4 Vb_5 Vc_1 Vc_2 Vc_3 Vc_4 Vc_5 Vservo_1 Vservo_2 Vservo_3 Vservo_4 Vservo_5
net class EMG_CRYSTAL: NetC_WIFI_X32_IN_2 NetC_WIFI_X32_OUT_2 WIFI_X32_RAW_IN WIFI_X32_RAW_OUT
net class EMG_SWITCH: NetL1_1 NetL1_2
net class EMG_SPI: MCU_SPI_MISO MCU_SPI_MOSI MCU_SPI_SCK MCU_WIFI_CS WIFI_SPI_CLK WIFI_SPI_CS WIFI_SPI_MISO WIFI_SPI_MOSI
net class EMG_ADC: ADC_EMG1 ADC_EMG2 ADC_EMG3 ADC_EMG4 ADC_EMG5 VOUT_1 VOUT_2 VOUT_3 VOUT_4 VOUT_5
net class EMG_REFERENCE: NetJ_FPC1_8 NetJ_FPC2_8 NetJ_FPC3_8 NetJ_FPC4_8 NetJ_FPC5_8 VDiv VREF_A VREF_B_SRC
net class EMG_POWER: 3V0_ANA 3V3_DIG VBAT_CELL VBUS VSYS
component class RADIO: C_WIFI_BULK C_WIFI_EN C_WIFI_VDD33 C_WIFI_VDD33_HF C_WIFI_VDDIO1 C_WIFI_VDDIO1_HF C_WIFI_VDDIO2 C_WIFI_VDDIO2_HF C_WIFI_X32_IN C_WIFI_X32_OUT R_WIFI_BOOT_OVR R_WIFI_BOOT_PD R_WIFI_CS_PD R_WIFI_EN_PD R_WIFI_UART_RX_LINK R_WIFI_UART_TX_LINK R_WIFI_X32_IN R_WIFI_X32_OUT U_WIFI1 X_WIFI_32K
component class MCU_ADC_SERVICE: C1_MCU C2_MCU C3_MCU C4_MCU C_ADC1 C_ADC2 C_ADC3 C_ADC4 C_ADC5 C_MCU_BULK C_MCU_VDD1 C_MCU_VDD2 C_MCU_VDD3 C_MCU_VDD4 C_MCU_VDD5 C_NRST C_VBAT C_VDDUSB MCU_VCAP R_ADC1 R_ADC2 R_ADC3 R_ADC4 R_ADC5 R_MCU_BOOT0_PD R_NRST R_SPI_CS R_SPI_MISO R_SPI_MOSI R_SPI_SCK U_MCU1
component class POWER_SERVICE: C1_EN1 C2_EN1 C3_EN1 C_BAT C_IN_ C_OUT_ C_UV_BYPASS C_VBUS CU6_1 CUP4 CUP4_1 CUP4_FB CUP5_1 CUP5_2 CUP5_3 CUP5_5 D_CC_ESD D_VBUS J_Li-Po J_USB_C L1 LED_CHG PWR_BTN_N Q_SHDN R_AL R_CHG_LED R_EN R_EN1_1 R_EN1_BIAS R_EN_PD R_INT_PULLUP R_KILL_PU R_LIM R_PGOOD R_SCL R_SDA R_SHDN_G R_SHDN_PD R_TH_BAT R_TMR R_TS_BOTTOM R_TS_SER R_TS_TOP RISET RJ1 RJ2 RUP_3 RUP_4 U_EN1 U_UV1 UP1 UP2 UP3 UP4
component class QUIET_CH4_CH5: CCU7 CCU8 CCU9 CCU10 CH_4 CH_5 CL_4 CL_5 Cservo_4 Cservo_5 CU_14 CU_24 INA4 INA5 J_FPC4 J_FPC5 RDD10 RDD11 RDD12 RDD13 RDD14 RDD15 RG_4 RG_5 RGN_4 RGN_5 RH_4 RH_5 RL_4 RL_5 Rservo_4 Rservo_5 U3
component class QUIET_CH2_CH3: CCU3 CCU4 CCU5 CCU6 CH_2 CH_3 CL_2 CL_3 Cservo_2 Cservo_3 CU_12 CU_22 INA2 INA3 J_FPC2 J_FPC3 RDD4 RDD5 RDD6 RDD7 RDD8 RDD9 RG_2 RG_3 RGN_2 RGN_3 RH_2 RH_3 RL_2 RL_3 Rservo_2 Rservo_3 U2
component class QUIET_CH1_REFERENCE: CCU1 CCU2 Cdiv Cdiv_1 Cdiv_10uF CH_1 CL_1 Cservo_1 CU_11 CU_21 INA1 J_FPC1 J_REF R_ref R_VREF1 R_VREF2 R_VREF3 R_VREF4 R_VREF5 RDD1 RDD2 RDD3 RG_1 RGN_1 RH_1 RL_1 Rservo_1 RV1 RV2 U1
net class EMG_GND: GND
net class EMG_CONTROL: AFE_EN BAT_TEMP FG_ALRT I2C_SCL I2C_SDA KILL_CTRL MCU_BOOT0 MCU_NRST MCU_PWR_INT_N MCU_SHUTDOWN MCU_SWCLK MCU_SWDIO MCU_VCAP MCU_WIFI_UART_RX MCU_WIFI_UART_TX NetC1_EN1_2 NetC2_EN1_1 NetC3_EN1_2 NetCUP4_FB_1 NetD_CC_ESD_1 NetD_CC_ESD_2 NetJP_WIFI_BOOT_1 NetLED_CHG_A NetLED_CHG_C NetPWR_BTN_N_A NetQ_SHDN_1 NetR_EN1_BIAS_2 NetR_LIM_2 NetR_TMR_2 NetRISET_1 SYS_EN TS USB_PGOOD_N WIFI_BOOT WIFI_CHIP_EN WIFI_SPI_RDY WIFI_UART_RX WIFI_UART_TX
net class EMG_ANALOG: INA_OUT_1 INA_OUT_2 INA_OUT_3 INA_OUT_4 INA_OUT_5 NetCH_1_2 NetCH_2_2 NetCH_3_2 NetCH_4_2 NetCH_5_2 NetCL_1_1 NetCL_2_1 NetCL_3_1 NetCL_4_1 NetCL_5_1 NetCservo_1_1 NetCservo_2_1 NetCservo_3_1 NetCservo_4_1 NetCservo_5_1 NetINA1_2 NetINA1_3 NetINA1_7 NetINA2_2 NetINA2_3 NetINA2_7 NetINA3_2 NetINA3_3 NetINA3_7 NetINA4_2 NetINA4_3 NetINA4_7 NetINA5_2 NetINA5_3 NetINA5_7 NetJ_REF_1 Va_1 Va_2 Va_3 Va_4 Va_5 Vb_1 Vb_2 Vb_3 Vb_4 Vb_5 Vc_1 Vc_2 Vc_3 Vc_4 Vc_5 Vservo_1 Vservo_2 Vservo_3 Vservo_4 Vservo_5
net class EMG_CRYSTAL: NetC_WIFI_X32_IN_2 NetC_WIFI_X32_OUT_2 WIFI_X32_RAW_IN WIFI_X32_RAW_OUT
net class EMG_SWITCH: NetL1_1 NetL1_2
net class EMG_SPI: MCU_SPI_MISO MCU_SPI_MOSI MCU_SPI_SCK MCU_WIFI_CS WIFI_SPI_CLK WIFI_SPI_CS WIFI_SPI_MISO WIFI_SPI_MOSI
net class EMG_ADC: ADC_EMG1 ADC_EMG2 ADC_EMG3 ADC_EMG4 ADC_EMG5 VOUT_1 VOUT_2 VOUT_3 VOUT_4 VOUT_5
net class EMG_REFERENCE: NetJ_FPC1_8 NetJ_FPC2_8 NetJ_FPC3_8 NetJ_FPC4_8 NetJ_FPC5_8 VDiv VREF_A VREF_B_SRC
net class EMG_POWER: 3V0_ANA 3V3_DIG VBAT_CELL VBUS VSYS

## Components (designator, comment, footprint, x,y, rotation, side; value= is the part's Value field where it differs from the comment)
C1_EN1 "GRM155R61C104KA88D" FP-GRM155-0_05-IPC_C 64.69,39.35 r180 bottom
C1_MCU "GRM155R61C104KA88D" FP-GRM155-0_05-IPC_C 48.58,33.1 r180 top
C2_EN1 "CC0402KRX7R7BB333" FP-CC0402-MFG 64.59,35.95 r0 bottom value="33 nF"
C2_MCU "MURATA_GRM155C71C105KE11D" *MURATA_GRM155C71C105KE11D_0 46.58,33.1 r0 top value="1 uF"
C3_EN1 "CC0402KRX5R6BB334" FP-CC0402-MFG 59.39,37.95 r0 bottom value="330 nF"
C3_MCU "GRM155R61C104KA88D" FP-GRM155-0_05-IPC_C 48.58,31.8 r180 top
C4_MCU "MURATA_GRM155C71C105KE11D" *MURATA_GRM155C71C105KE11D_0 46.58,31.8 r0 top value="1 uF"
C_ADC1 "GRM1555C1E103JE01D" FP-GRM155-0_15-IPC_A 47.38,30.1 r180 top
C_ADC2 "GRM1555C1E103JE01D" FP-GRM155-0_15-IPC_A 47.38,28.45 r180 top
C_ADC3 "GRM1555C1E103JE01D" FP-GRM155-0_15-IPC_A 47.38,26.8 r180 top
C_ADC4 "GRM1555C1E103JE01D" FP-GRM155-0_15-IPC_A 51.68,25.4 r270 top
C_ADC5 "GRM1555C1E103JE01D" FP-GRM155-0_15-IPC_A 54.58,25.4 r90 top
C_BAT "GCM21BC71E106KE36L" FP-GCM21B-0_2-e0_2_0_7-MFG 14.25,44.2 r90 bottom
C_DRL_DEC "100nF" EMG_DRL_C0402 13.506,14.528 r0 bottom
C_DRL_FB "1nF" EMG_DRL_C0402 13.542,13.676 r0 bottom
C_IN_ "GRM155C71C105KE11D" *MURATA_GRM155C71C105KE11D_0 14.85,36.75 r0 bottom value="1 uF"
C_MCU_BULK "GCM21BC71E106KE36L" FP-GCM21B-0_2-e0_2_0_7-MFG 67.55,43.6 r90 top
C_MCU_VDD1 "GRM155R61C104KA88D" FP-GRM155-0_05-IPC_C 48.28,36.5 r0 top
C_MCU_VDD2 "GRM155R61C104KA88D" FP-GRM155-0_05-IPC_C 53.08,25.7 r90 top
C_MCU_VDD3 "GRM155R61C104KA88D" FP-GRM155-0_05-IPC_C 65.08,25.9 r90 top
C_MCU_VDD4 "GRM155R61C104KA88D" FP-GRM155-0_05-IPC_C 67.78,41.5 r0 top
C_MCU_VDD5 "GRM155R61C104KA88D" FP-GRM155-0_05-IPC_C 52.08,45.03 r0 top
C_NRST "GRM155R61C104KA88D" FP-GRM155-0_05-IPC_C 46.18,35 r180 top
C_OUT_ "GCM21BC71E106KE36L" FP-GCM21B-0_2-e0_2_0_7-MFG 16.6,39.65 r90 bottom
C_UV_BYPASS "GRM155R61C104KA88D" FP-GRM155-0_05-IPC_C 45.398,41.642 r0 bottom
C_VBAT "GRM155R61C104KA88D" FP-GRM155-0_05-IPC_C 48.28,39 r0 top
C_VBUS "GRM155C71C105KE11D" *MURATA_GRM155C71C105KE11D_0 18.7,36.6 r0 top value="1 uF"
C_VDDUSB "GRM155R61C104KA88D" FP-GRM155-0_05-IPC_C 67.78,40.1 r0 top
C_WIFI_BULK "GRM219R60J476ME44D" FP-GRM219-0_2-0_1-IPC_A 45.58,39.3 r90 bottom
C_WIFI_EN "GRM155R61C104KA88D" FP-GRM155-0_05-IPC_C 44.28,34.855 r0 top
C_WIFI_VDD33 "GCM21BC71E106KE36L" FP-GCM21B-0_2-e0_2_0_7-MFG 42.88,31.5 r270 top
C_WIFI_VDD33_HF "GRM155R61C104KA88D" FP-GRM155-0_05-MFG 40.855,32 r270 top
C_WIFI_VDDIO1 "GCM21BC71E106KE36L" FP-GCM21B-0_2-e0_2_0_7-MFG 30.08,31.5 r90 top
C_WIFI_VDDIO1_HF "GRM155R61C104KA88D" FP-GRM155-0_05-MFG 31.965,32 r270 top
C_WIFI_VDDIO2 "GCM21BC71E106KE36L" FP-GCM21B-0_2-e0_2_0_7-MFG 44.23,42.8 r180 top
C_WIFI_VDDIO2_HF "GRM155R61C104KA88D" FP-GRM155-0_05-MFG 43.78,44.8 r180 top
C_WIFI_X32_IN "DNP" FP-GRM155-0_05-IPC_C 38.93,28.4 r90 top value="DNP - tuning"
C_WIFI_X32_OUT "DNP" FP-GRM155-0_05-IPC_C 36.43,28.4 r90 top value="DNP - tuning"
CCU1 "GRM155R61C104KA88D" FP-GRM155-0_05-IPC_C 21.25,20.55 r0 top
CCU2 "MURATA_GRM155C71C105KE11D" *MURATA_GRM155C71C105KE11D_0 21.25,19.55 r180 top value="1 uF"
CCU3 "MURATA_GRM155C71C105KE11D" *MURATA_GRM155C71C105KE11D_0 32.05,19.55 r180 top value="1 uF"
CCU4 "GRM155R61C104KA88D" FP-GRM155-0_05-IPC_C 32.05,20.55 r0 top
CCU5 "MURATA_GRM155C71C105KE11D" *MURATA_GRM155C71C105KE11D_0 42.85,19.55 r180 top value="1 uF"
CCU6 "GRM155R61C104KA88D" FP-GRM155-0_05-IPC_C 42.85,20.55 r0 top
CCU7 "MURATA_GRM155C71C105KE11D" *MURATA_GRM155C71C105KE11D_0 53.65,19.55 r180 top value="1 uF"
CCU8 "GRM155R61C104KA88D" FP-GRM155-0_05-IPC_C 53.65,20.55 r0 top
CCU9 "MURATA_GRM155C71C105KE11D" *MURATA_GRM155C71C105KE11D_0 64.45,19.55 r180 top value="1 uF"
CCU10 "GRM155R61C104KA88D" FP-GRM155-0_05-IPC_C 64.45,20.55 r0 top
Cdiv "GRM155R61C104KA88D" FP-GRM155-0_05-IPC_C 16.4,26.8 r0 bottom
Cdiv_1 "GRM155R61C104KA88D" FP-GRM155-0_05-IPC_C 16.1,24.8 r0 bottom
Cdiv_10uF "GCM21BC71E106KE36L" FP-GCM21B-0_2-e0_2_0_7-MFG 13,26.8 r0 bottom
CH_1 "GRM1555C1H392GE01D" CAPC1005X55N 20.1,21.95 r270 bottom
CH_2 "GRM1555C1H392GE01D" CAPC1005X55N 30.6,18.85 r270 bottom
CH_3 "GRM1555C1H392GE01D" CAPC1005X55N 41.6,21.95 r270 bottom
CH_4 "GRM1555C1H392GE01D" CAPC1005X55N 52.2,18.85 r270 bottom
CH_5 "GRM1555C1H392GE01D" CAPC1005X55N 63.2,21.95 r270 bottom
CL_1 "GRM21BR71C824KA01L" CAPC2013X135X45ML10T25 21,24.75 r0 bottom
CL_2 "GRM21BR71C824KA01L" CAPC2013X135X45ML10T25 29.7,16.05 r180 bottom
CL_3 "GRM21BR71C824KA01L" CAPC2013X135X45ML10T25 42.5,24.75 r0 bottom
CL_4 "GRM21BR71C824KA01L" CAPC2013X135X45ML10T25 48.2,16.05 r180 bottom
CL_5 "GRM21BR71C824KA01L" CAPC2013X135X45ML10T25 64.1,24.75 r0 bottom
Cservo_1 "GRM31CR71E335KA88L" GRM31x 21.7,17.65 r0 bottom
Cservo_2 "GRM31CR71E335KA88L" GRM31x 29,23.15 r180 bottom
Cservo_3 "GRM31CR71E335KA88L" GRM31x 43.2,17.65 r0 bottom
Cservo_4 "GRM31CR71E335KA88L" GRM31x 50.6,23.15 r180 bottom
Cservo_5 "GRM31CR71E335KA88L" GRM31x 64.8,17.65 r0 bottom
CU6_1 "GRM155R61C104KA88D" FP-GRM155-0_05-IPC_C 22.16,31.975 r180 bottom
CU_11 "GRM155R61C104KA88D" FP-GRM155-0_05-IPC_C 19.3,19.85 r0 bottom
CU_12 "GRM155R61C104KA88D" FP-GRM155-0_05-IPC_C 31.4,20.95 r180 bottom
CU_14 "GRM155R61C104KA88D" FP-GRM155-0_05-IPC_C 53,20.95 r180 bottom
CU_21 "MURATA_GRM155C71C105KE11D" *MURATA_GRM155C71C105KE11D_0 21.05,19.85 r0 bottom value="1 uF"
CU_22 "MURATA_GRM155C71C105KE11D" *MURATA_GRM155C71C105KE11D_0 29.65,20.95 r180 bottom value="1 uF"
CU_24 "MURATA_GRM155C71C105KE11D" *MURATA_GRM155C71C105KE11D_0 51.25,20.95 r180 bottom value="1 uF"
CUP4 "GRM219R60J476ME44D" FP-GRM219-0_2-0_1-IPC_A 48.212,40.434 r270 bottom
CUP4_1 "GCM21BC71E106KE36L" FP-GCM21B-0_2-e0_2_0_7-MFG 53.412,40.434 r270 bottom
CUP4_FB "GRM1555C1H100JA01D" CAPC1005X55X25LL05T10 49.512,37.133 r180 bottom
CUP5_1 "GRM155C71C105KE11D" *MURATA_GRM155C71C105KE11D_0 37.85,29.338 r0 bottom value="1 uF"
CUP5_2 "GRM155C71C105KE11D" *MURATA_GRM155C71C105KE11D_0 32.55,29.338 r0 bottom value="1 uF"
CUP5_3 "GCM21BC71E106KE36L" FP-GCM21B-0_2-e0_2_0_7-MFG 31.75,27.738 r0 bottom
CUP5_5 "GCM21BC71E106KE36L" FP-GCM21B-0_2-e0_2_0_7-MFG 38.25,30.937 r0 bottom
D_CC_ESD "PESD5V0X2UTR" SOT95P230X100-3N 19.8,40.9 r180 top
D_VBUS "PESD5V0S1BA,115" FP-SOD323-CA-MFG 18.5,34.4 r90 top
INA1 "AD8237ARMZ" EMG_AD8237_R3_MSOP8 18.7,18.2 r0 top
INA2 "AD8237ARMZ" EMG_AD8237_R3_MSOP8 29.5,18.2 r0 top
INA3 "AD8237ARMZ" EMG_AD8237_R3_MSOP8 40.3,18.2 r0 top
INA4 "AD8237ARMZ" EMG_AD8237_R3_MSOP8 51.1,18.2 r0 top
INA5 "AD8237ARMZ" EMG_AD8237_R3_MSOP8 61.9,18.2 r0 top
J_FPC1 "BK13C06-10DS/2-0.35V(895)" HIROSE_BK13C06-10DS/2-0.35V(895) 18.7,12.2 r0 top
J_FPC2 "BK13C06-10DS/2-0.35V(895)" HIROSE_BK13C06-10DS/2-0.35V(895) 29.5,12.2 r0 top
J_FPC3 "BK13C06-10DS/2-0.35V(895)" HIROSE_BK13C06-10DS/2-0.35V(895) 40.3,12.2 r0 top
J_FPC4 "BK13C06-10DS/2-0.35V(895)" HIROSE_BK13C06-10DS/2-0.35V(895) 51.1,12.2 r0 top
J_FPC5 "BK13C06-10DS/2-0.35V(895)" HIROSE_BK13C06-10DS/2-0.35V(895) 61.9,12.2 r0 top
J_Li-Po "Header 3" HDR1X3 24.369,35.454 r90 top
J_REF "REFERENCE ELECTRODE:" HDR1X2 11.93,12.2 r0 top
J_SWD "Header 5H" EMG_TC2030_NL 25.428,28.9 r90 top
J_USB_C "USB4105-GF-A-060" GCT_USB4105-GF-A-060 12.4,39.4 r270 top
JP_WIFI_BOOT "Header 2H" EMG_SJ_2P_NO 31.194,39.205 r0 bottom
L1 "DFE21CCN1R0MELL" FP-DFE21CC_EL-MFG 50.812,42.634 r0 bottom
LED_CHG "SML-LXT0805SRW-TR" LEDC2012X120N 25.428,43.6 r90 top
MCU_VCAP "CL21A475KOFNNNE" CAPC2012X135N 62.68,25.4 r90 top
PWR_BTN_N "TS-1187A-B-A-B" SW_TS-1187A-B-A-B 14.71,27.621 r0 top
Q_SHDN "BSS138" FP-318-08-IPC_B 56.49,37.95 r0 bottom
R_ADC1 "0402WGF3300TCE" RESC1005X40N 49.08,30.1 r90 top
R_ADC2 "0402WGF3300TCE" RESC1005X40N 49.08,28.45 r90 top
R_ADC3 "0402WGF3300TCE" RESC1005X40N 49.08,26.8 r90 top
R_ADC4 "0402WGF3300TCE" RESC1005X40N 49.88,25.4 r0 top
R_ADC5 "0402WGF3300TCE" RESC1005X40N 56.08,24.5 r180 top
R_AL "AT0402DRD0710KL" FP-AT0402-IPC_A 17.16,31.475 r180 bottom
R_CHG_LED "AC0402FR-071K5L" FP-AC0402-MFG 18.2,40.15 r90 bottom
R_DRL_FB "1.5M" EMG_DRL_R0603 12.445,16.793 r0 bottom
R_DRL_OUT1 "470k" EMG_DRL_R0603 18.1,15.2 r90 bottom
R_DRL_OUT2 "470k" EMG_DRL_R0603 19.896,14.999 r90 bottom
R_DRL_SEL "0R" EMG_DRL_R0603 22.142,12.833 r90 bottom
R_DRL_VA1 "1M" EMG_DRL_R0603 24.255,11.58 r90 bottom
R_DRL_VA2 "1M" EMG_DRL_R0603 34.9,11 r0 bottom
R_DRL_VA3 "1M" EMG_DRL_R0603 45.7,11 r0 bottom
R_DRL_VA4 "1M" EMG_DRL_R0603 56.5,11 r0 bottom
R_DRL_VA5 "1M" EMG_DRL_R0603 67.171,11.483 r0 bottom
R_DRL_VB1 "1M" EMG_DRL_R0603 24.9,14.086 r0 bottom
R_DRL_VB2 "1M" EMG_DRL_R0603 34.9,12.7 r0 bottom
R_DRL_VB3 "1M" EMG_DRL_R0603 45.7,12.7 r0 bottom
R_DRL_VB4 "1M" EMG_DRL_R0603 56.5,12.7 r0 bottom
R_DRL_VB5 "1M" EMG_DRL_R0603 67.429,13.183 r0 bottom
R_DRL_VC1 "1M" EMG_DRL_R0603 25.55,16.912 r90 bottom
R_DRL_VC2 "1M" EMG_DRL_R0603 34.9,14.4 r0 bottom
R_DRL_VC3 "1M" EMG_DRL_R0603 45.9,14.4 r0 bottom
R_DRL_VC4 "1M" EMG_DRL_R0603 56.5,14.4 r0 bottom
R_DRL_VC5 "1M" EMG_DRL_R0603 67.3,21.3 r90 bottom
R_EN "AC0402FR-7D100KL" FP-AC0402-MFG 43.698,38.442 r0 bottom value=100KΩ
R_EN1_1 "RC0402FR-071KL" FP-RC0402-0_4-IPC_A 64.49,40.25 r180 bottom
R_EN1_BIAS "AT0402DRD0710KL" FP-AT0402-IPC_A 12.95,42.25 r0 bottom
R_EN_PD "AC0402FR-071ML" FP-AC0402-IPC_A 37.922,26.668 r0 bottom
R_INT_PULLUP "AT0402DRD0710KL" FP-AT0402-IPC_A 59.59,35.75 r0 bottom
R_KILL_PU "AT0402DRD0710KL" FP-AT0402-IPC_A 59.59,39.45 r180 bottom
R_LIM "AC0402FR-073K48L" FP-AC0402-MFG 18.9,37.55 r180 bottom
R_MCU_BOOT0_PD "RT0402BRD0710KL" FP-RT0402-MFG 55.08,45.06 r0 top value=10KΩ
R_NRST "RT0402BRD0710KL" FP-RT0402-MFG 48.08,35 r180 top value=10KΩ
R_PGOOD "RC0402FR-0747KL" RESC1005X40X25ML05T10 18.85,42.4 r90 bottom
R_ref "AC0402FR-7D100KL" FP-AC0402-MFG 13.2,15.4 r0 bottom value=100KΩ
R_SCL "CRCW04024K70FKED" FP-CRCW0402-e3-IPC_B 17.36,32.575 r180 bottom
R_SDA "CRCW04024K70FKED" FP-CRCW0402-e3-IPC_B 17.36,33.575 r180 bottom
R_SHDN_G "AT0402DRD0710KL" FP-AT0402-IPC_A 53.69,37.25 r180 bottom
R_SHDN_PD "AC0402FR-7D100KL" FP-AC0402-MFG 53.69,38.45 r180 bottom value=100KΩ
R_SPI_CS "ERJ2RKF22R0X" RES_ERJ2RKF22R0X 58.48,26.05 r90 top
R_SPI_MISO "ERJ2RKF22R0X" RES_ERJ2RKF22R0X 29.08,44.2 r180 top
R_SPI_MOSI "ERJ2RKF22R0X" RES_ERJ2RKF22R0X 57.08,26.05 r90 top
R_SPI_SCK "ERJ2RKF22R0X" RES_ERJ2RKF22R0X 55.68,25.99 r90 top
R_TH_BAT "103AT-2" EMG_REMOTE_NTC_TERMINALS_2P 26.939,37.853 r90 top
R_TMR "RC0402FR-0768K1L" RESC1005X40X25ML05T10 14.15,34.828 r90 bottom
R_TS_BOTTOM "RC0402FR-0728KL" RESC1005X40X25NL05T10 10.903,36.673 r90 bottom
R_TS_SER "AC0402FR-7D100KL" FP-AC0402-MFG 10.8,38.65 r270 bottom value=100KΩ
R_TS_TOP "RC0402FR0733K2L" RESC1005X40X25NL05T10 10.794,40.349 r90 bottom
R_VREF1 "ERA2AEB680X" RES_ERA2AEB680X 22.6,12.4 r90 top
R_VREF2 "ERA2AEB680X" RES_ERA2AEB680X 33.4,12.4 r90 top
R_VREF3 "ERA2AEB680X" RES_ERA2AEB680X 44.2,12.4 r90 top
R_VREF4 "ERA2AEB680X" RES_ERA2AEB680X 55,12.4 r90 top
R_VREF5 "ERA2AEB680X" RES_ERA2AEB680X 65.8,12.4 r90 top
R_WIFI_BOOT_OVR "0402WGF1001TCE" RESC1005X40N 31.194,37.205 r0 bottom
R_WIFI_BOOT_PD "RT0402BRD0710KL" FP-RT0402-MFG 28.88,39.8 r0 top value=10KΩ
R_WIFI_CS_PD "RT0402BRD0710KL" FP-RT0402-MFG 46.68,43.7 r90 top value=10KΩ
R_WIFI_EN_PD "RT0402BRD0710KL" FP-RT0402-MFG 45.78,37.9 r90 top value=10KΩ
R_WIFI_UART_RX_LINK "ERJ2GE0R00X" RESC1005X40X25LL05T05 45.011,42.909 r90 bottom
R_WIFI_UART_TX_LINK "ERJ2GE0R00X" RESC1005X40X25LL05T05 43.626,40.805 r0 bottom
R_WIFI_X32_IN "ERJ2GE0R00X" RESC1005X40X25LL05T05 38.315,32.2 r90 top
R_WIFI_X32_OUT "ERJ2GE0R00X" RESC1005X40X25LL05T05 37.045,32.2 r90 top
RDD1 "ERA2ARB103X" RES_ERA2ARB103X 24.5,16.8 r0 top
RDD2 "AR02BTC5001" FP-AC0402-MFG 24.5,15 r0 top value=5KΩ
RDD3 "ERA2ARB103X" RES_ERA2ARB103X 24.5,18.6 r0 top
RDD4 "ERA2ARB103X" RES_ERA2ARB103X 35.3,16.8 r0 top
RDD5 "AR02BTC5001" FP-AC0402-MFG 35.3,15 r0 top value=5KΩ
RDD6 "ERA2ARB103X" RES_ERA2ARB103X 35.3,18.6 r0 top
RDD7 "ERA2ARB103X" RES_ERA2ARB103X 46.1,16.8 r0 top
RDD8 "AR02BTC5001" FP-AC0402-MFG 46.1,15 r0 top value=5KΩ
RDD9 "ERA2ARB103X" RES_ERA2ARB103X 46.1,18.6 r0 top
RDD10 "ERA2ARB103X" RES_ERA2ARB103X 56.9,16.8 r0 top
RDD11 "AR02BTC5001" FP-AC0402-MFG 56.9,15 r0 top value=5KΩ
RDD12 "ERA2ARB103X" RES_ERA2ARB103X 56.9,18.6 r0 top
RDD13 "ERA2ARB103X" RES_ERA2ARB103X 67.3,16.8 r0 top
RDD14 "AR02BTC5001" FP-AC0402-MFG 67.3,15 r0 top value=5KΩ
RDD15 "ERA2ARB103X" RES_ERA2ARB103X 67.3,18.6 r0 top
RG_1 "RT0402BRD0780K6L" FP-RT0402-MFG 18.9,21.95 r270 bottom value=80.6KΩ
RG_2 "RT0402BRD0780K6L" FP-RT0402-MFG 31.8,18.85 r270 bottom value=80.6KΩ
RG_3 "RT0402BRD0780K6L" FP-RT0402-MFG 40.4,21.95 r90 bottom value=80.6KΩ
RG_4 "RT0402BRD0780K6L" FP-RT0402-MFG 53.4,18.85 r270 bottom value=80.6KΩ
RG_5 "RT0402BRD0780K6L" FP-RT0402-MFG 62,21.95 r90 bottom value=80.6KΩ
RGN_1 "RT0402BRD0710KL" FP-RT0402-MFG 21.9,21.95 r270 bottom value=10KΩ
RGN_2 "RT0402BRD0710KL" FP-RT0402-MFG 28.8,18.85 r270 bottom value=10KΩ
RGN_3 "RT0402BRD0710KL" FP-RT0402-MFG 43.4,21.95 r270 bottom value=10KΩ
RGN_4 "RT0402BRD0710KL" FP-RT0402-MFG 50.4,18.85 r270 bottom value=10KΩ
RGN_5 "RT0402BRD0710KL" FP-RT0402-MFG 65,21.95 r270 bottom value=10KΩ
RH_1 "ERA-2AEB2612X" FP-AC0402-IPC_A 18.1,21.75 r0 top
RH_2 "ERA-2AEB2612X" FP-AC0402-IPC_A 28.9,21.75 r0 top
RH_3 "ERA-2AEB2612X" FP-AC0402-IPC_A 39.7,21.75 r0 top
RH_4 "ERA-2AEB2612X" FP-AC0402-IPC_A 49.3,21.75 r0 top
RH_5 "ERA-2AEB2612X" FP-AC0402-IPC_A 61.3,21.75 r0 top
RISET "RC0402FR-072K94L" RESC1005X40X25ML05T10 12.504,36.6 r0 bottom
RJ1 "RC0402FR-075K1L" RESC1005X40X25NL05T10 18.9,43.1 r0 top
RJ2 "RC0402FR-075K1L" RESC1005X40X25NL05T10 18.9,44.1 r0 top
RL_1 "RT0402BRD071K07L" FP-RT0402-MFG 20.1,22.3 r0 top value=1.07KΩ
RL_2 "RT0402BRD071K07L" FP-RT0402-MFG 30.9,22.3 r0 top value=1.07KΩ
RL_3 "RT0402BRD071K07L" FP-RT0402-MFG 41.7,22.3 r0 top value=1.07KΩ
RL_4 "RT0402BRD071K07L" FP-RT0402-MFG 52.3,21.7 r0 top value=1.07KΩ
RL_5 "RT0402BRD071K07L" FP-RT0402-MFG 63.3,22.3 r0 top value=1.07KΩ
Rservo_1 "RC0402FR-072ML" RESC1005X40X25NL05T10 21.7,15.55 r0 bottom
Rservo_2 "RC0402FR-072ML" RESC1005X40X25NL05T10 29,25.25 r180 bottom
Rservo_3 "RC0402FR-072ML" RESC1005X40X25NL05T10 43.2,15.55 r0 bottom
Rservo_4 "RC0402FR-072ML" RESC1005X40X25NL05T10 50.6,25.25 r180 bottom
Rservo_5 "RC0402FR-072ML" RESC1005X40X25NL05T10 64.8,15.55 r0 bottom
RUP_3 "AC0402FR-07560KL" FP-AC0402-IPC_A 49.512,38.134 r180 bottom
RUP_4 "AC0402FR-7D100KL" FP-AC0402-MFG 51.412,38.134 r180 bottom value=100KΩ
RV1 "AC0402FR-7D100KL" FP-AC0402-MFG 12,24.8 r0 bottom value=100KΩ
RV2 "AC0402FR-7D100KL" FP-AC0402-MFG 14.1,24.8 r0 bottom value=100KΩ
TP_GND "5021" EMG_TP_FLAT_1R2 48.226,44.205 r0 bottom
TP_MCU_BOOT0 "5021" EMG_TP_FLAT_1R2 55.28,41.238 r0 bottom
TP_WIFI_BOOT "5021" EMG_TP_FLAT_1R2 32.693,41.141 r0 bottom
TP_WIFI_CHIP_EN "5021" EMG_TP_FLAT_1R2 44.926,33.655 r0 bottom
TP_WIFI_UART_RX "5021" EMG_TP_FLAT_1R2 47.268,37.227 r0 bottom
TP_WIFI_UART_TX "5021" EMG_TP_FLAT_1R2 46.307,43.653 r0 bottom
U1 "MCP6404T-E/ST" TSSOP-ST14_N 14.6,20.4 r180 bottom
U2 "MCP6404T-E/ST" TSSOP-ST14_N 36.1,20.4 r0 bottom
U3 "MCP6404T-E/ST" TSSOP-ST14_N 57.7,20.4 r0 bottom
U_DRL1 "MCP6401T-E/OT" EMG_MCP6401_SOT23_5 15.7,15.48 r180 bottom
U_EN1 "LTC2954ITS8-1#TRMPBF" LT-TS8-8-TSOT-23_V 62.49,37.65 r180 bottom
U_MCU1 "STM32U575VIT6" QFP50P1600X1600X160-100N 58.08,35.5 r0 top
U_UV1 "TPS3808G33DBVR" DBV0006A_L 42.698,42.742 r0 bottom
U_WIFI1 "ST67W611M1A6BTR" ST67W611M1A6BTR 36.08,41.8 r0 top
UP1 "BQ24072TRGTR" RGT0016C_V 13.6,39.4 r0 bottom
UP2 "TPS631000DRLR" SOT50P160X60-8N 50.812,40.434 r270 bottom
UP3 "TPS7A2030PDBVR" FP-DBV0005A-IPC_C 35.25,28.337 r180 bottom
UP4 "MAX17048G+T10" SON50P200X200X80-9N 19.76,32.275 r180 bottom
X_WIFI_32K "Q13FC13500003" EMG_FC135_3215_2P 37.68,30.3 r180 top value="32.768 kHz"

## Footprints (in the part's own frame and the unit in brackets; to place one, negate y for a bottom-side part, rotate by r counter-clockwise, add the part's x,y. Pads: shape width x height; smd on the part's side, far side on the other; paste and mask are expansions set on the pad)
*MURATA_GRM155C71C105KE11D_0 [mm]
  rect 0.4x0.5 smd: 1(-0.4,0) 2(0.4,0)
  silkscreen extent -0.53,-0.63 0.53,0.63, body extent -0.55,-0.3 0.55,0.3, height 0.6
CAPC1005X55N [mm]
  rect 0.54x0.6 smd paste+0 mask+0.102: 1(-0.432,0) 2(0.432,0)
  body extent -0.5,-0.25 0.5,0.25, height 0.55
CAPC1005X55X25LL05T10 [mm] "Chip Capacitor, 2-Leads, Body 1.00x0.50mm, IPC High Density"
  rect 0.56x0.52 smd: 1(-0.39,0) 2(0.39,0)
  body extent -0.53,-0.28 0.53,0.28, height 0.55
CAPC2012X135N [mm]
  rrect25% 1.05x1.38 smd paste+0 mask+0.05: 1(-0.888,0) 2(0.888,0)
  body extent -1,-0.63 1,0.63, height 1.35
CAPC2013X135X45ML10T25 [mm] "Chip Capacitor, 2-Leads, Body 2.00x1.25mm, IPC Low Density"
  rect 1.4x1.5 smd: 1(-0.95,0) 2(0.95,0)
  body extent -1.05,-0.67 1.05,0.67, height 1.35
DBV0006A_L [mm] "SOT23, 6-Leads, Body 3.05x1.75mm, Pitch 0.95mm, IPC High Density"
  rrect18% 0.8x0.55 smd: 1(-1.275,0.95) 2(-1.275,0) 3(-1.275,-0.95) 4(1.275,-0.95) 5(1.275,0) 6(1.275,0.95)
  silkscreen extent -1.4,-1.55 0.5,1.9, body extent -1.42,-1.46 1.42,1.46, height 1.11
EMG_AD8237_R3_MSOP8 [mm] "AD8237ARMZ RM-8; numeric pin mapping 1-8; R3 2026-09-12; geometry retained from inspected source"
  rect 0.35x1.1 smd mask+0.05: 1(-0.975,-2.35) 2(-0.325,-2.35) 3(0.325,-2.35) 4(0.975,-2.35) 5(0.975,2.35) 6(0.325,2.35) 7(-0.325,2.35) 8(-0.975,2.35)
  silkscreen extent -2.36,-1.93 1.6,1.6, body extent -1.5,-2.45 1.5,2.45, height 1.1
EMG_DRL_C0402 [mm] "DRL DNP provision; pad geometry from manufacturer documented recommended land pattern; controlled source package graphics retained"
  rect 0.4x0.5 smd paste+0 mask+0: 1(-0.4,0) 2(0.4,0)
  silkscreen extent -0.64,-0.67 0.64,0.67, body extent -0.5,-0.25 0.5,0.25, height 0.55
EMG_DRL_R0603 [mm] "DRL DNP provision; pad geometry from manufacturer documented recommended land pattern; controlled source package graphics retained"
  rect 0.65x0.9 smd: 1(-0.725,0) 2(0.725,0)
  silkscreen extent -0.03,-0.4 0.03,0.4
EMG_FC135_3215_2P [mm] "Epson Q13FC13500003 FC-135, 3.2x1.5mm, two numeric pads; preserved 1.0x1.8mm lands at 2.5mm pitch"
  rect 1x1.8 smd: 1(-1.25,0) 2(1.25,0)
  silkscreen extent -0.4,-0.75 0.4,0.75, body extent 0,0 0,0
EMG_MCP6401_SOT23_5 [mm] "DRL DNP provision; pad geometry from manufacturer documented recommended land pattern; controlled source package graphics retained"
  rect 0.6x1.1 smd paste+0 mask+0: 1(-0.95,-1.4) 2(0,-1.4) 3(0.95,-1.4) 4(0.95,1.4) 5(-0.95,1.4)
  silkscreen extent -2.45,0.85 0.05,1.45, body extent -1.4,-1.45 1.4,1.45, height 1.45
EMG_REMOTE_NTC_TERMINALS_2P [mm] "Wire-termination provision ONLY. Copper/drill copied unchanged from FP-103AT-2-MFG. Remote sensor body excluded; wire fit and strain relief require qualification."
  rect 1.15x1.15 hole 0.65 paste-1000 mask+0: 1(-1.27,0)
  round 1.15 hole 0.65 paste-1000 mask+0: 2(1.27,0)
EMG_SJ_2P_NO [mm]
  rect 0.9x1.2 smd: 1(-0.6,0) 2(0.6,0)
EMG_TC2030_NL [mil]
  round 30.98 smd: 1(-50,-25) 2(-50,25) 3(50,-25) 4(0,25) 5(0,-25) ""(50,25)
  round 39.02 hole 39.02 unplated: ""(-100,0) ""(100,-40) ""(100,40)
  silkscreen extent -79,-53 -63,-53
EMG_TP_FLAT_1R2 [mm]
  round 1.2 smd: TP(0,0)
FP-318-08-IPC_B [mm]
  rect 1.524x0.578 smd paste+0 mask+0: 1(-0.91,0.95)
  rrect100% 1.524x0.578 smd paste+0 mask+0: 2(-0.91,-0.95) 3(0.91,0)
  silkscreen extent -0.65,-1.45 0.65,1.45, body extent -1.2,-1.45 1.2,1.45, height 1.11
FP-AC0402-IPC_A [mm]
  rect 0.715x0.672 smd paste+0 mask+0: 1(-0.479,0) 2(0.479,0)
  silkscreen extent -0.84,-0.74 0.84,0.74, body extent -0.5,-0.25 0.5,0.25, height 0.37
FP-AC0402-MFG [mm]
  rect 0.5x0.6 smd paste+0 mask+0: 1(-0.5,0) 2(0.5,0)
  silkscreen extent -0.5,-0.67 0.5,0.67, body extent -0.5,-0.25 0.5,0.25, height 0.37
FP-AT0402-IPC_A [mm]
  rect 0.76x0.672 smd paste+0 mask+0: 1(-0.476,0) 2(0.476,0)
  silkscreen extent -0.86,-0.74 0.86,-0.74, body extent -0.5,-0.25 0.5,0.25, height 0.35
FP-CC0402-MFG [mm]
  rect 0.5x0.5 smd paste+0 mask+0: 1(-0.5,0) 2(0.5,0)
  silkscreen extent -0.53,0.67 0.53,0.67, body extent -0.5,-0.25 0.5,0.25, height 0.55